# EAGLE board SparkFun_MicroMod_Function_SARA-R5-Panel (EAGLE 9.6.2), part 1 of 4
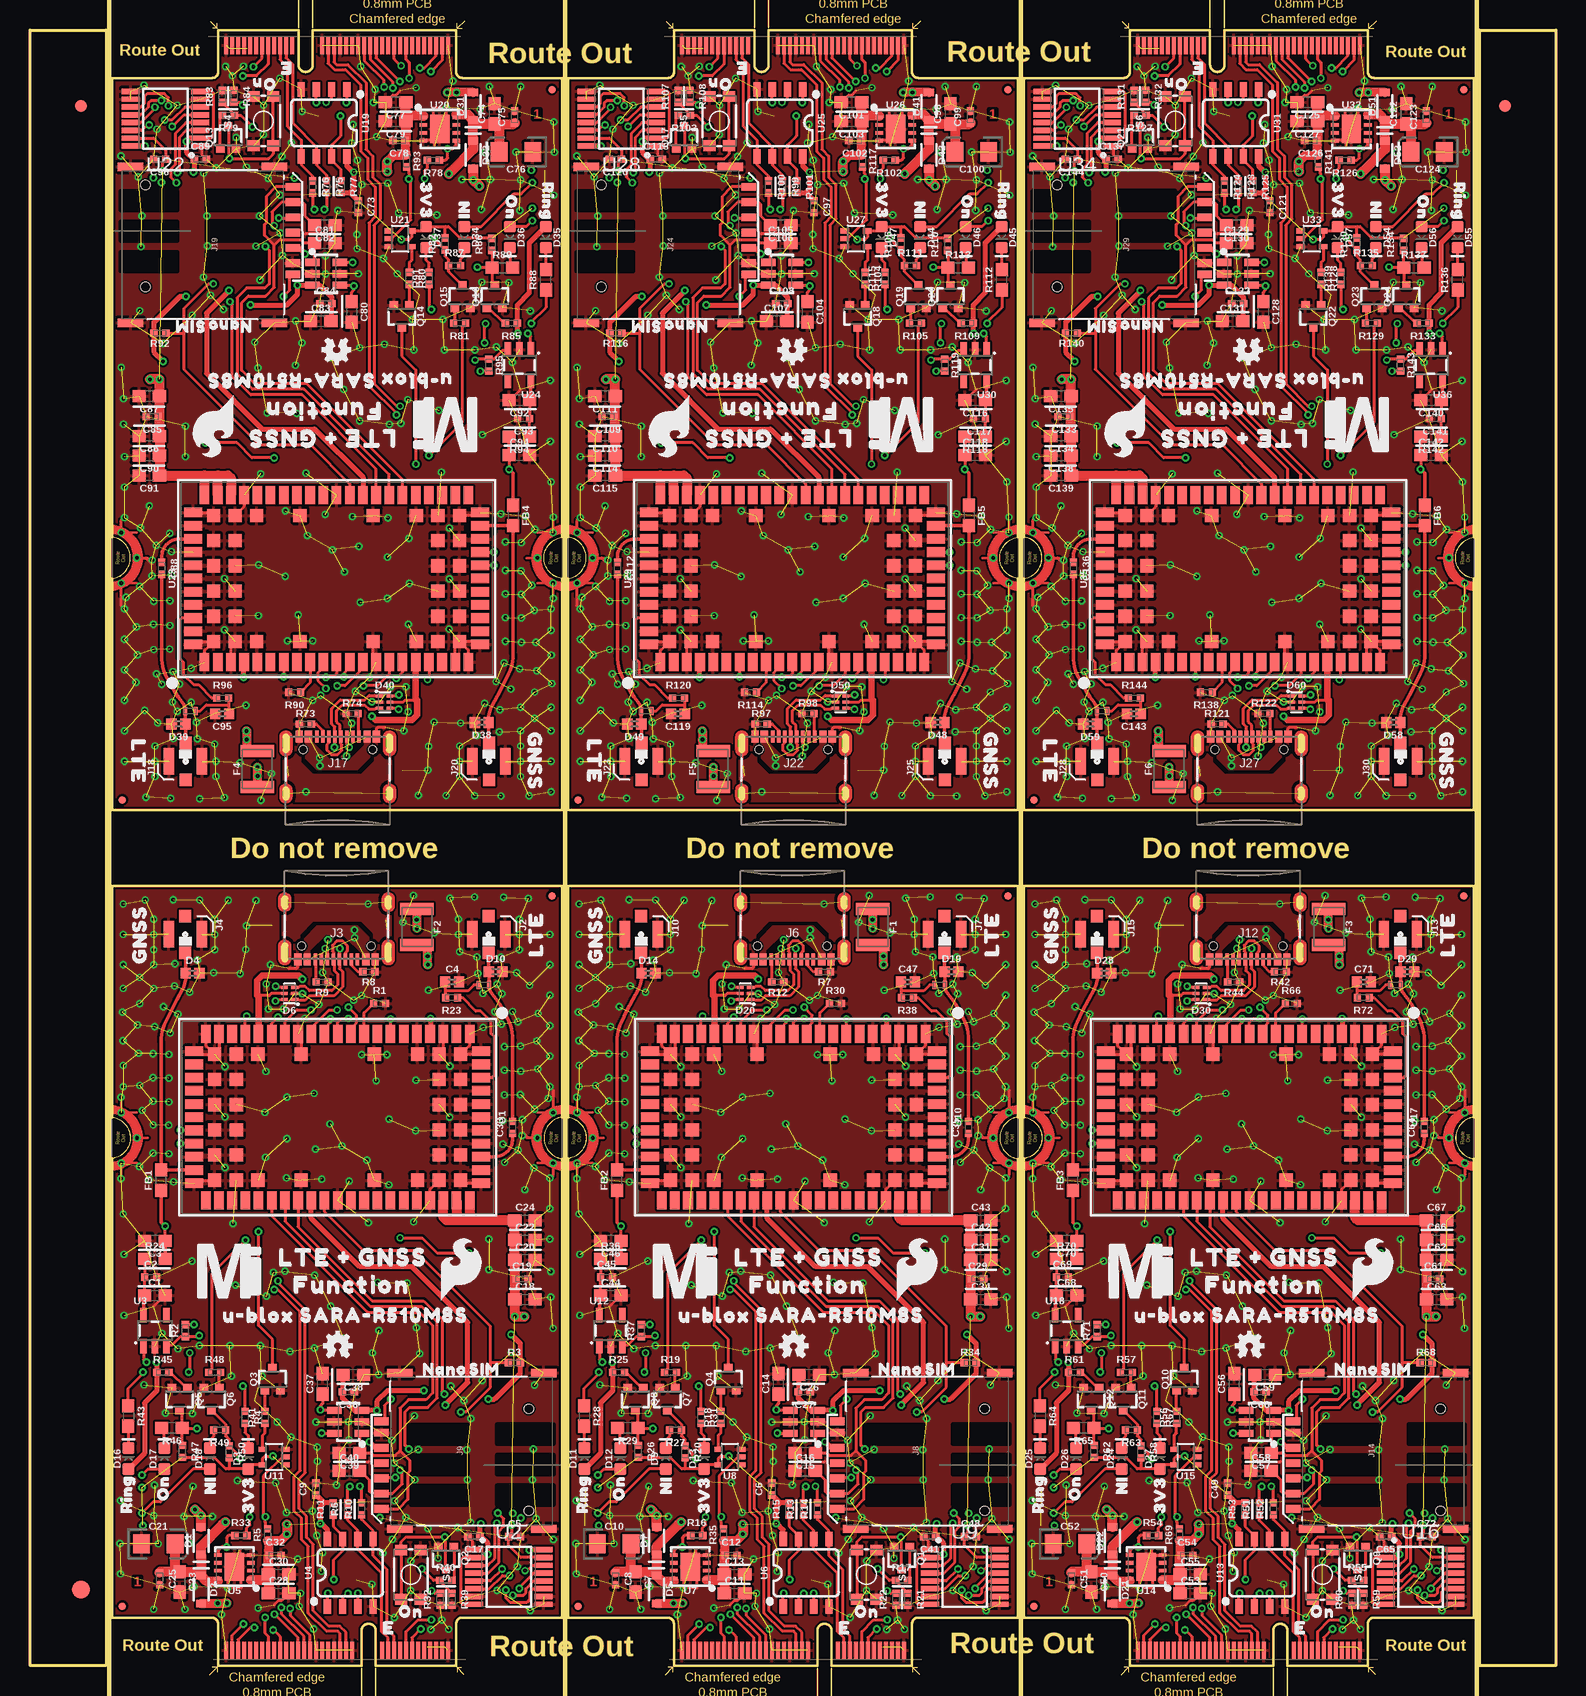
[diagram p0: board, top side]
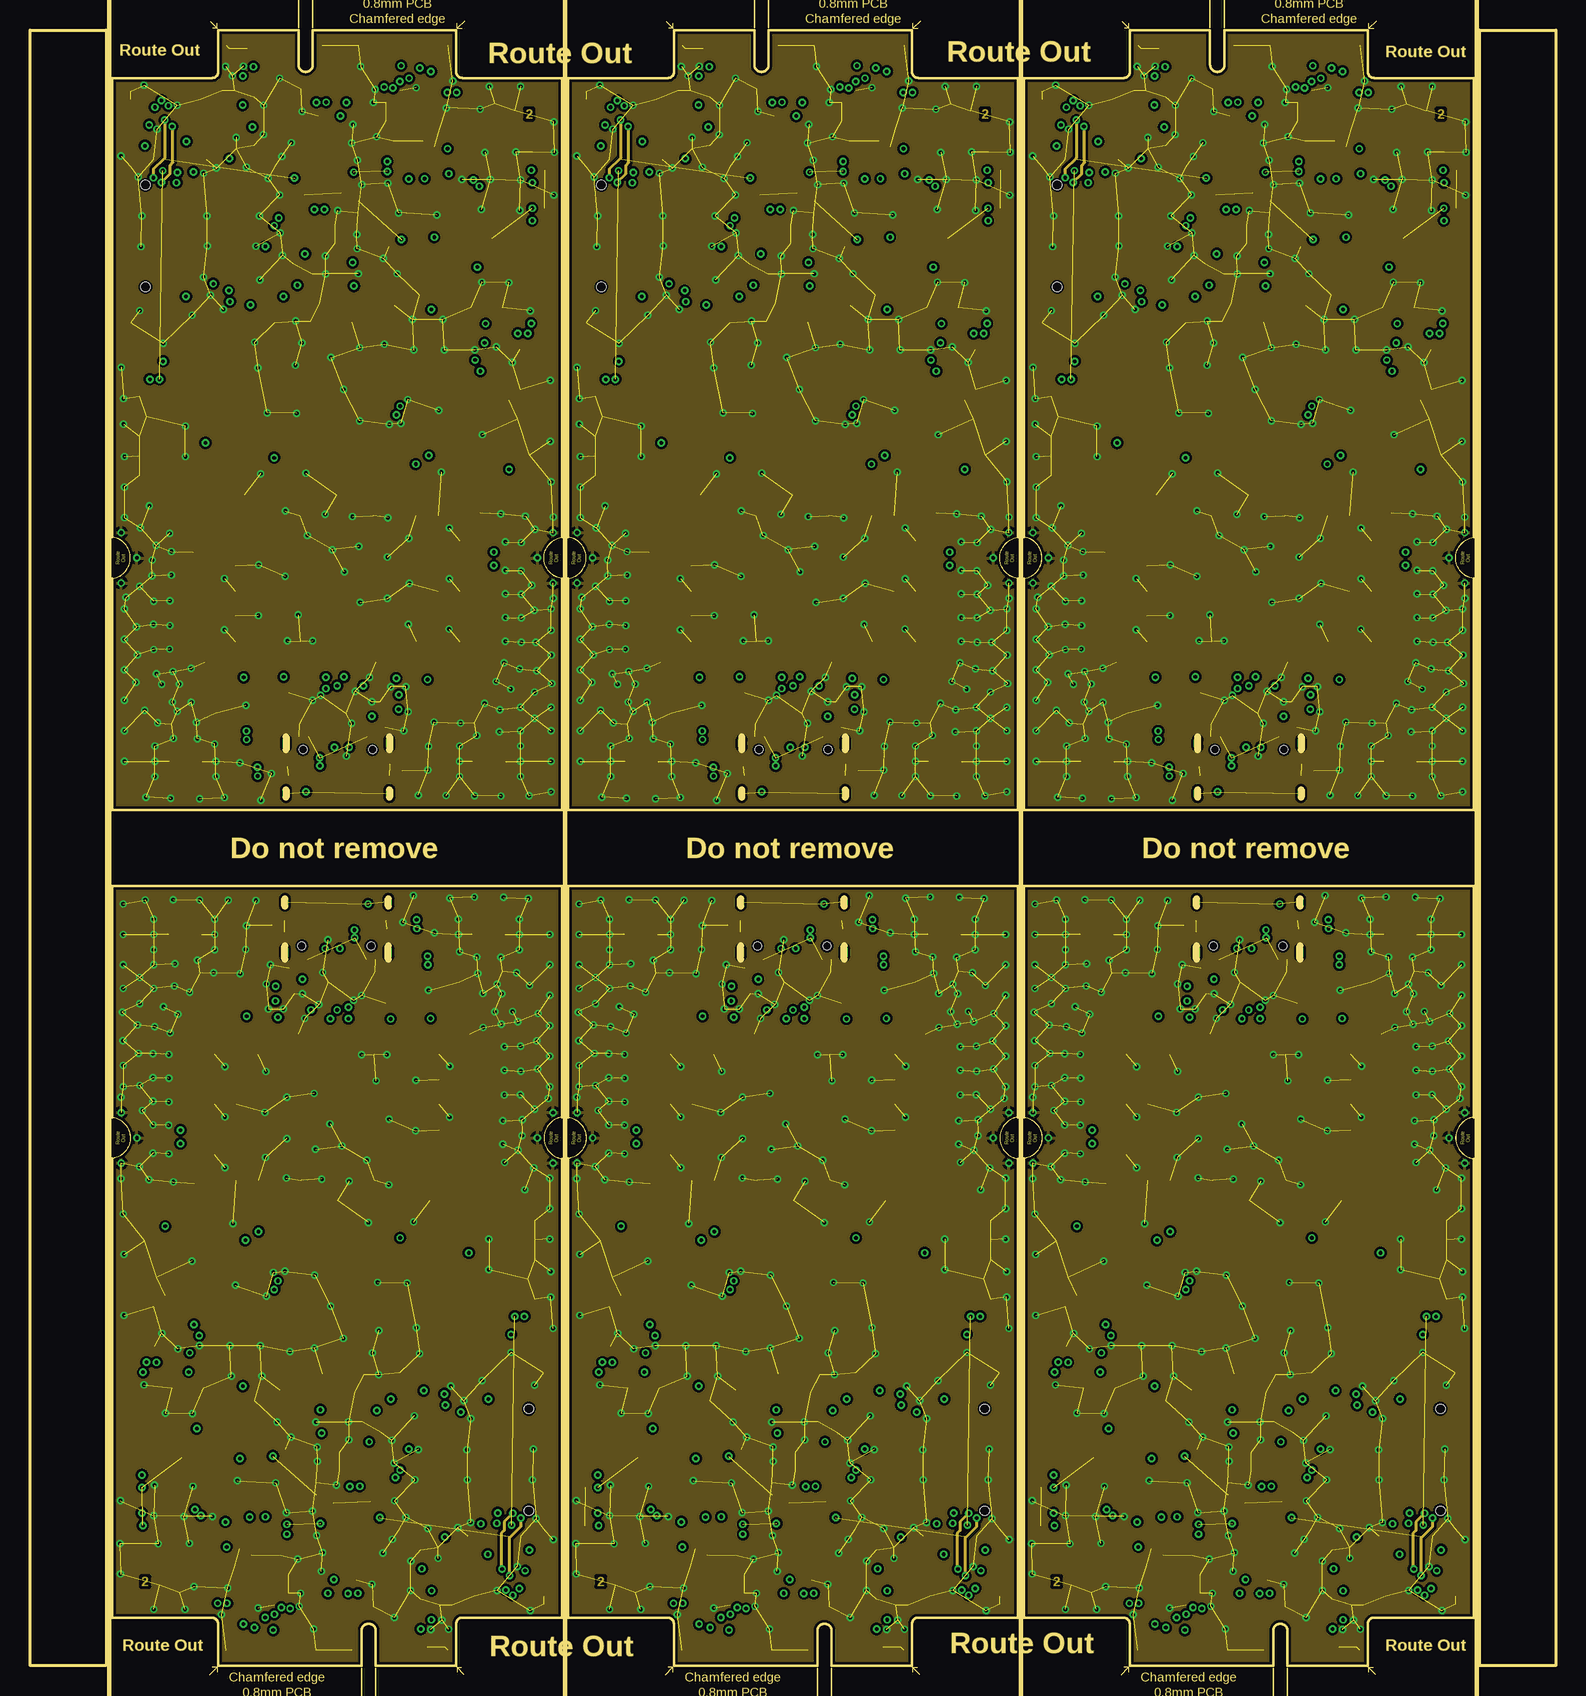
[diagram p1: board, inner layer Route2]
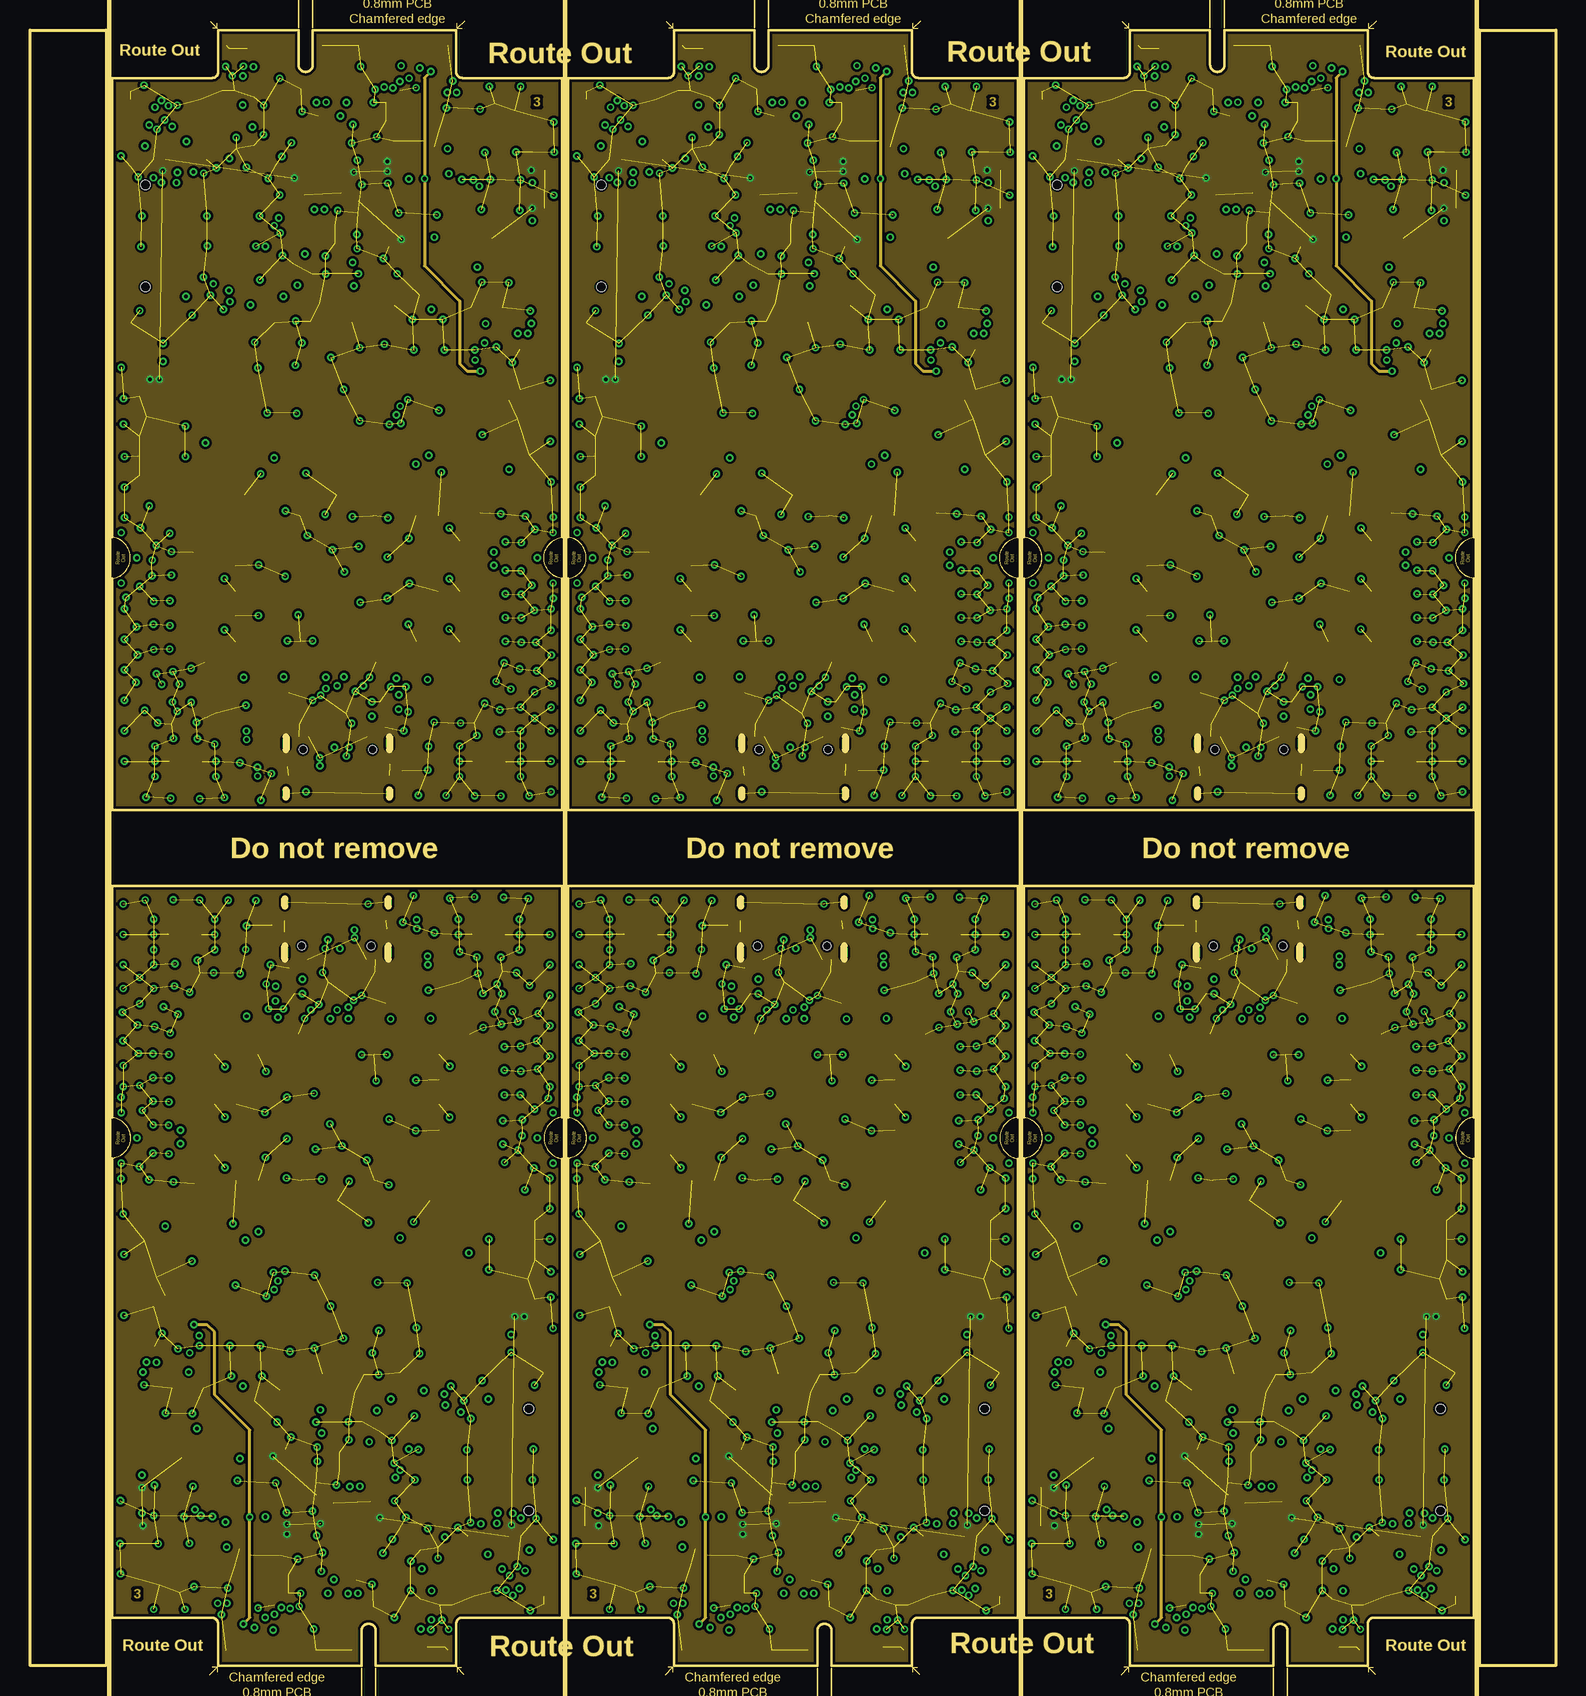
[diagram p2: board, inner layer Route15]
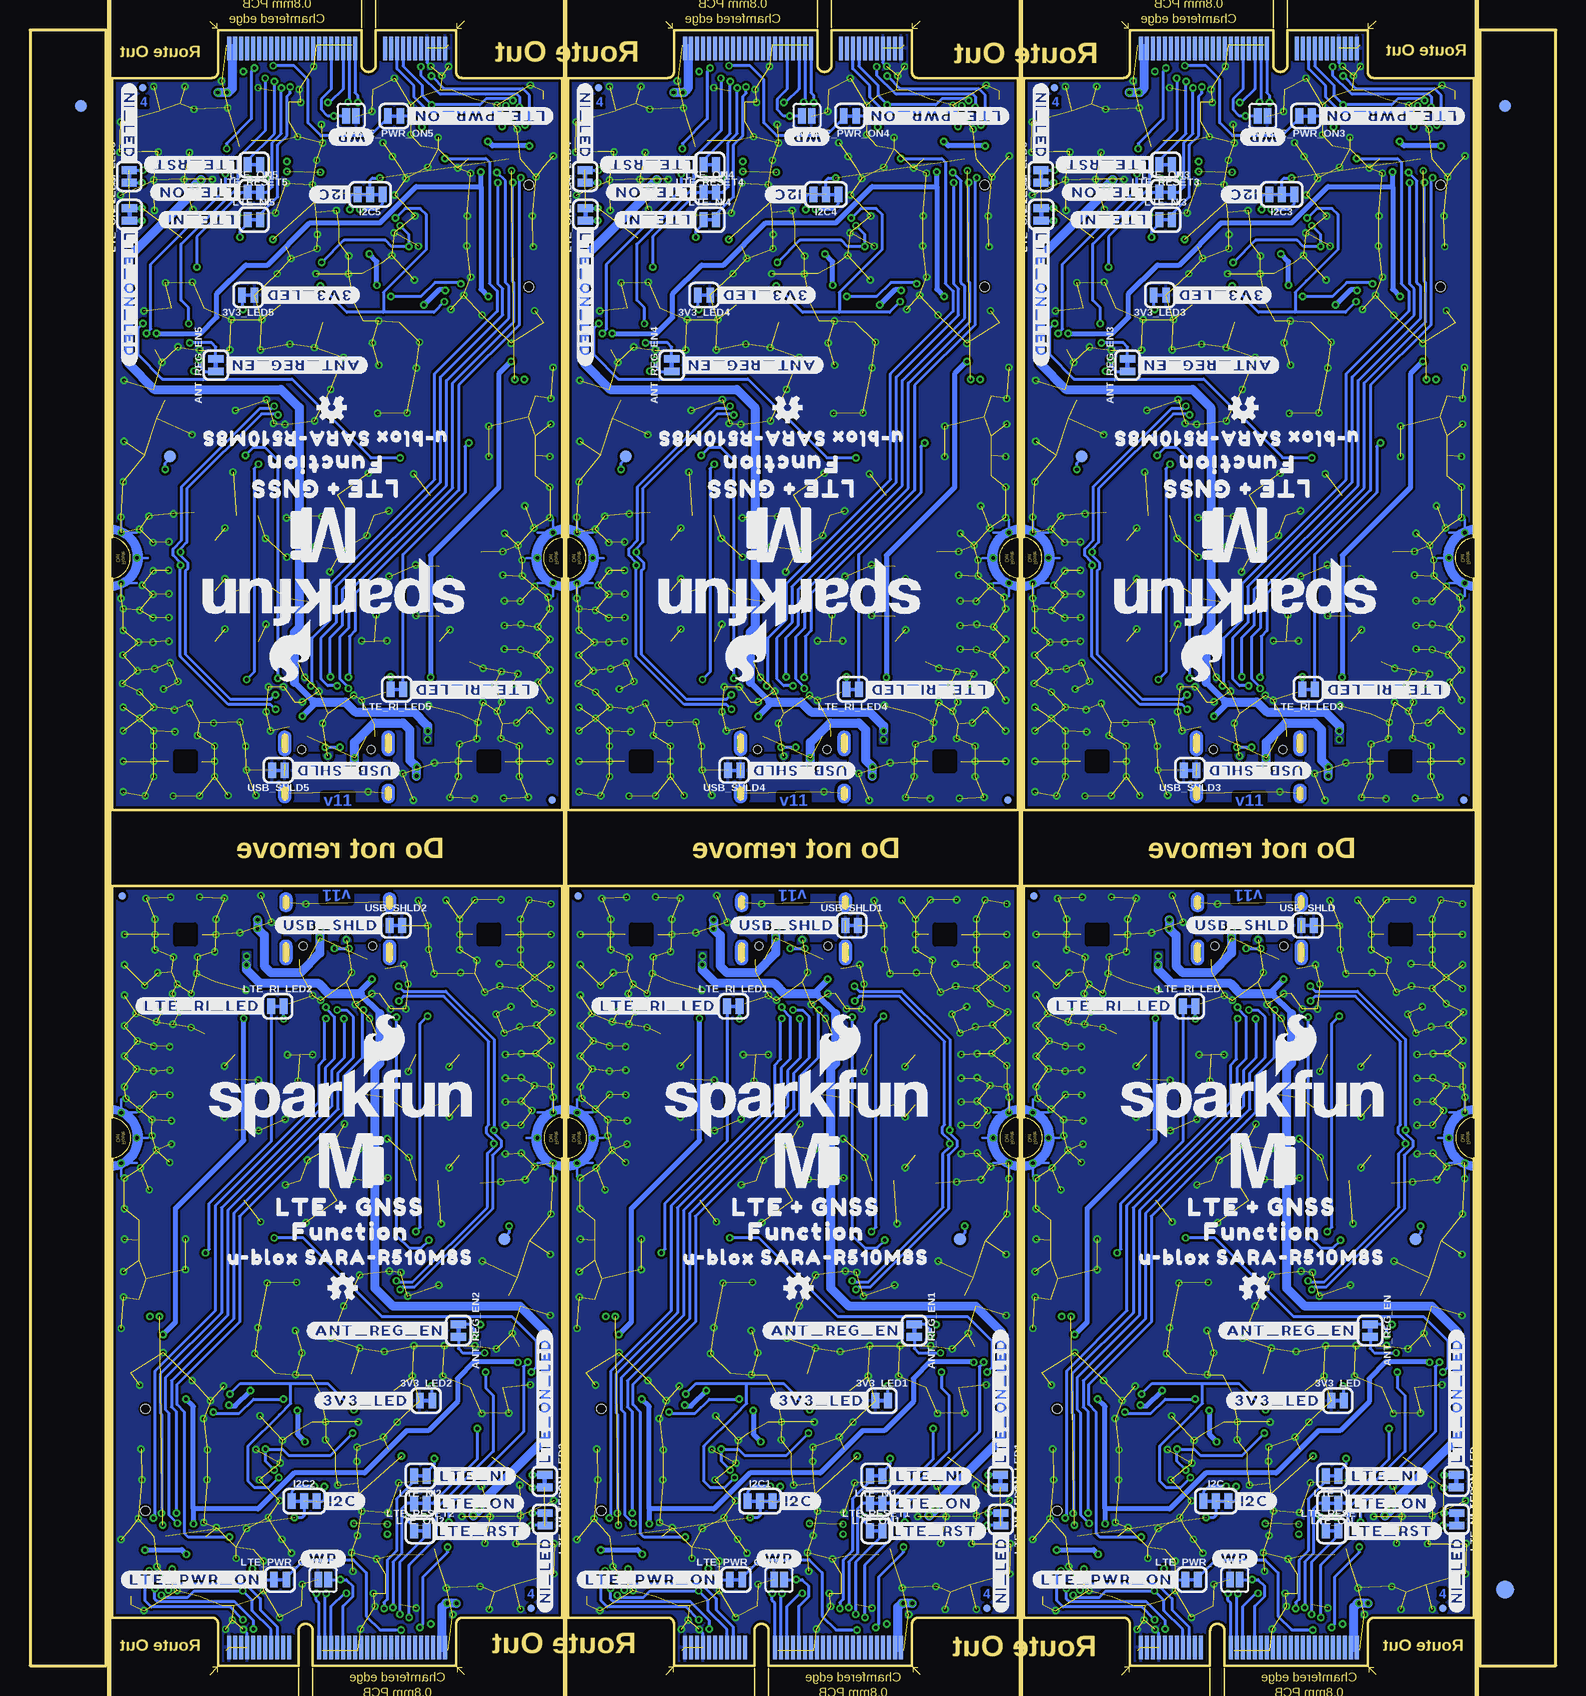
[diagram p3: board, bottom side, seen from below]

Size 127.2 x 136.35 mm. Coordinates in mm from the lower left corner, seen from the top.
Outline: 35.53,0 28.83,0 28.83,2.9 arc180 27.63,2.9 27.63,0 15.68,0 15.68,3.5 arc90 15.15,4 6.86,4 6.86,42.29 arc165 6.86,45.72 6.86,65 44.35,65 44.35,45.72 arc165 44.35,42.27 44.35,4 36,4 arc90 35.53,3.5 35.53,0
Outline: 73.53,0 66.83,0 66.83,2.9 arc180 65.63,2.9 65.63,0 53.68,0 53.68,3.5 arc90 53.15,4 44.86,4 44.86,42.29 arc165 44.86,45.72 44.86,65 82.35,65 82.35,45.72 arc165 82.35,42.27 82.35,4 74,4 arc90 73.53,3.5 73.53,0
Outline: 111.53,0 104.83,0 104.83,2.9 arc180 103.63,2.9 103.63,0 91.68,0 91.68,3.5 arc90 91.15,4 82.86,4 82.86,42.29 arc165 82.86,45.72 82.86,65 120.34,65 120.34,45.72 arc165 120.34,42.27 120.34,4 112,4 arc90 111.53,3.5 111.53,0
Outline: 15.68,136.35 22.38,136.35 22.38,133.45 arc180 23.58,133.45 23.58,136.35 35.53,136.35 35.53,132.85 arc90 36.05,132.35 44.35,132.35 44.35,94.06 arc165 44.35,90.63 44.35,71.35 6.86,71.35 6.86,90.63 arc165 6.86,94.08 6.86,132.35 15.2,132.35 arc90 15.68,132.85 15.68,136.35
Outline: 53.68,136.35 60.38,136.35 60.38,133.45 arc180 61.58,133.45 61.58,136.35 73.53,136.35 73.53,132.85 arc90 74.05,132.35 82.35,132.35 82.35,94.06 arc165 82.35,90.63 82.35,71.35 44.86,71.35 44.86,90.63 arc165 44.86,94.08 44.86,132.35 53.2,132.35 arc90 53.68,132.85 53.68,136.35
Outline: 91.67,136.35 98.37,136.35 98.37,133.45 arc180 99.57,133.45 99.57,136.35 111.52,136.35 111.52,132.85 arc90 112.05,132.35 120.34,132.35 120.34,94.06 arc165 120.34,90.63 120.34,71.35 82.86,71.35 82.86,90.63 arc165 82.86,94.08 82.86,132.35 91.2,132.35 arc90 91.67,132.85 91.67,136.35
Outline: 120.85,136.35 127.2,136.35 127.2,0 120.85,0 120.85,136.35
Outline: 0,136.35 6.35,136.35 6.35,0 0,0 0,136.35
Copper layers (1+2*15+16): Top 0.035mm / dielectric 1.5mm / Route2 0.035mm / dielectric 0.15mm / Route15 0.035mm / dielectric 0.2mm / Bottom 0.035mm
Design rules "SparkFun_MicroMod_Function_SARA-R5": minimum track width 4mil, minimum drill 0.2mm, track to track 4mil, track to pad 4mil, pad to pad 4mil, via to via 4mil, smd to smd 4mil, copper to edge 6mil, drill to drill 6mil, minimum pad ring 3mil, minimum via ring 3mil, stop-mask expansion 2.5mil, vias tented up to drill 25mil, thermal gap 10mil
Net classes: 2 supply: width 0.406 mm; 3 RF: width 0.312 mm, clearance 0.178 mm; 4 DiffPair: width 0.24 mm, clearance 0.178 mm
bRestrict: area 16,3.6 to 16.3,3.8; area 54,3.6 to 54.3,3.8; area 92,3.6 to 92.3,3.8; area 34.9,132.6 to 35.3,132.7; area 72.9,132.6 to 73.3,132.7; area 110.9,132.6 to 111.2,132.7
Milling: 4 lines

## Footprints (pad centres in the part's own frame; a part is rotated, then mirrored left to right if it is on the bottom)
SMT-JUMPER_2_NC_TRACE_SILK = smd 0.66 x 1.27: 1 -0.521,0; 2 0.521,0
0603 = smd 1.1 x 1: 1 -0.85,0; 2 0.85,0
0402-TIGHT = smd 0.6 x 0.6: 1 -0.5,0; 2 0.5,0
0402 = smd 0.85 x 0.9: 1 -0.58,0; 2 0.58,0
EIA3216 = smd 1.4 x 1.6: + 1.4,0; - -1.4,0
SOD-323 = smd 0.63 x 0.83: A 1.15,0; C -1.15,0
LED-0603 = smd 1 x 1: A -0.877,0; C 0.877,0
SOT886 = smd 0.61 x 0.25: 1 -0.405,0.5 | smd 0.56 x 0.25: 2 -0.43,0; 3 -0.43,-0.5; 4 0.43,-0.5; 5 0.43,0; 6 0.43,0.5
SOT23-6L = smd 0.6 x 1.2: 1 -0.95,-1.15; 2 0,-1.15; 3 0.95,-1.15; 4 0.95,1.15; 5 0,1.15; 6 -0.95,1.15
FIDUCIAL-1X2 = smd 1 x 1: 1 0,0
FIDUCIAL-1.5X3 = smd 1.5 x 1.5: 1 0,0
1210 = smd 1 x 2.8: 1 -1.5,0; 2 1.5,0
FIDUCIAL-MICRO = smd 0.635 x 0.635: 1 0,0
SMT-JUMPER_3_2-NC_TRACE_SILK = smd 0.66 x 1.27: 1 -1.041,0; 2 0,0; 3 1.041,0
M.2-CARD-E-22_FUNCTION_STANDARD = smd 0.35 x 1.45: 1 9.25,1.275; 3 8.75,1.275; 5 8.25,1.275; 7 7.75,1.275; 9 7.25,1.275; 11 6.75,1.275; 13 6.25,1.275; 15 5.75,1.275; 17 5.25,1.275; 19 4.75,1.275; 21 4.25,1.275; 23 3.75,1.275; 33 1.25,1.275; 35 0.75,1.275; 37 0.25,1.275; 39 -0.25,1.275; 41 -0.75,1.275; 43 -1.25,1.275; 45 -1.75,1.275; 47 -2.25,1.275; 49 -2.75,1.275; 51 -3.25,1.275; 53 -3.75,1.275; 55 -4.25,1.275; 57 -4.75,1.275; 59 -5.25,1.275; 61 -5.75,1.275; 63 -6.25,1.275; 65 -6.75,1.275; 67 -7.25,1.275; 69 -7.75,1.275; 71 -8.25,1.275; 73 -8.75,1.275; 75 -9.25,1.275 | smd 0.35 x 1.95 bottom: 2 9,1.525; 4 8.5,1.525; 6 8,1.525; 8 7.5,1.525; 10 7,1.525; 12 6.5,1.525; 14 6,1.525; 16 5.5,1.525; 18 5,1.525; 20 4.5,1.525; 22 4,1.525; 32 1.5,1.525; 34 1,1.525; 36 0.5,1.525; 38 0,1.525; 40 -0.5,1.525; 42 -1,1.525; 44 -1.5,1.525; 46 -2,1.525; 48 -2.5,1.525; 50 -3,1.525; 52 -3.5,1.525; 54 -4,1.525; 56 -4.5,1.525; 58 -5,1.525; 60 -5.5,1.525; 62 -6,1.525; 64 -6.5,1.525; 66 -7,1.525; 68 -7.5,1.525; 70 -8,1.525; 72 -8.5,1.525; 74 -9,1.525 | drill 0.305 pad 0.61: GND1 -18,41.9; GND2 -16.7,44; GND3 -18,46.1; GND4 18,41.9; GND5 16.7,44; GND6 18,46.1
U.FL = smd 2.2 x 0.85: 1 0,1.375; 2 0,-1.375 | smd 1.05 x 1: FEED 1.525,0; NC -1.525,0
USB-C-16P-2LAYER-PADS = smd 0.3 x 1: A5 -1.25,-0.34; A6 -0.25,-0.34; A7 0.25,-0.34; A8 1.25,-0.34; B5 1.75,-0.34; B6 0.75,-0.34; B7 -0.75,-0.34; B8 -1.75,-0.34 | smd 0.6 x 1: GND -3.225,-0.34; GND2 3.225,-0.34; VBUS1 -2.45,-0.34; VBUS2 2.45,-0.34 | drill 0.4 pad 0.6 long: SHLD1 -4.318,-0.915; SHLD2 4.318,-0.915; SHLD3 -4.318,-5.095; SHLD4 4.318,-5.095 | hole 0.65: -2.89,-1.445; 2.89,-1.445
NANO_SIM_PP = smd 0.7 x 2.1: A1 6.495,6; A2 -6.495,6; A3 -6.495,-6; A4 6.495,-6 | smd 0.65 x 1.23: C1 0.255,7.535; C2 -2.285,7.535; C3 -4.825,7.535; C5 1.525,7.535; C6 -1.015,7.535; C7 -3.555,7.535; CD 2.475,7.535 | hole 0.75: 3.505,-4.75; -4.995,-4.75
0402_COILCRAFT = smd 0.356 x 0.66: P$1 -0.432,0; P$2 0.432,0
SOT323 = smd 0.7 x 0.7: 1 -0.65,-0.925; 2 0.65,-0.925; 3 0,0.925
TACTILE_SWITCH_SMD_4.6X2.8MM = smd 0.9 x 1: 1 -2.05,-0.8; 2 2.05,-0.8; 3 2.05,0.8; 4 -2.05,0.8
PAD.03X.04 = smd 1.016 x 1.016: 1 0,0
SARA-LGA = smd 0.8 x 1.5: 1 -11,-6.95; 2 -9.9,-6.95; 3 -8.8,-6.95; 4 -7.7,-6.95; 5 -6.6,-6.95; 6 -5.5,-6.95; 7 -4.4,-6.95; 8 -3.3,-6.95; 9 -2.2,-6.95; 10 -1.1,-6.95; 11 0,-6.95; 12 1.1,-6.95; 13 2.2,-6.95; 14 3.3,-6.95; 15 4.4,-6.95; 16 5.5,-6.95; 17 6.6,-6.95; 18 7.7,-6.95; 19 8.8,-6.95; 20 9.9,-6.95; 21 11,-6.95; 33 11,6.95; 34 9.9,6.95; 35 8.8,6.95; 36 7.7,6.95; 37 6.6,6.95; 38 5.5,6.95; 39 4.4,6.95; 40 3.3,6.95; 41 2.2,6.95; 42 1.1,6.95; 43 0,6.95; 44 -1.1,6.95; 45 -2.2,6.95; 46 -3.3,6.95; 47 -4.4,6.95; 48 -5.5,6.95; 49 -6.6,6.95; 50 -7.7,6.95; 51 -8.8,6.95; 52 -9.9,6.95; 53 -11,6.95 | smd 1.5 x 0.8: 22 11.95,-5.5; 23 11.95,-4.4; 24 11.95,-3.3; 25 11.95,-2.2; 26 11.95,-1.1; 27 11.95,0; 28 11.95,1.1; 29 11.95,2.2; 30 11.95,3.3; 31 11.95,4.4; 32 11.95,5.5; 54 -11.95,5.5; 55 -11.95,4.4; 56 -11.95,3.3; 57 -11.95,2.2; 58 -11.95,1.1; 59 -11.95,0; 60 -11.95,-1.1; 61 -11.95,-2.2; 62 -11.95,-3.3; 63 -11.95,-4.4; 64 -11.95,-5.5 | smd 1.1 x 1.1: 65 -10.25,-5.25; 66 -10.25,-3.15; 67 -10.25,-1.05; 68 -10.25,1.05; 69 -10.25,3.15; 70 -10.25,5.25; 71 -8.45,-5.25; 72 -8.45,-3.15; 73 -8.45,-1.05; 74 -8.45,1.05; 75 -8.45,3.15; 76 -8.45,5.25; 77 -6.65,-5.25; 78 -6.65,5.25; 79 -3.05,-5.25; 80 -3.05,5.25; 81 3.05,-5.25; 82 3.05,5.25; 83 6.65,-5.25; 84 6.65,5.25; 85 8.45,-5.25; 86 8.45,-3.15; 87 8.45,-1.05; 88 8.45,1.05; 89 8.45,3.15; 90 8.45,5.25; 91 10.25,-5.25; 92 10.25,-3.15; 93 10.25,-1.05; 94 10.25,1.05; 95 10.25,3.15; 96 10.25,5.25
SOP65P640X120-16N = smd 1.5 x 0.45: 1 -2.9,2.275; 2 -2.9,1.625; 3 -2.9,0.975; 4 -2.9,0.325; 5 -2.9,-0.325; 6 -2.9,-0.975; 7 -2.9,-1.625; 8 -2.9,-2.275; 9 2.9,-2.275; 10 2.9,-1.625; 11 2.9,-0.975; 12 2.9,-0.325; 13 2.9,0.325; 14 2.9,0.975; 15 2.9,1.625; 16 2.9,2.275
SOT23-5 = smd 0.55 x 1.2: 1 -0.95,-1.3; 2 0,-1.3; 3 0.95,-1.3; 4 0.95,1.3; 5 -0.95,1.3
SO08 = smd 0.6 x 1.2: 1 -1.905,-2.8; 2 -0.635,-2.8; 3 0.635,-2.8; 4 1.905,-2.8; 5 1.905,2.8; 6 0.635,2.8; 7 -0.635,2.8; 8 -1.905,2.8
UDFN-8 = smd 0.3 x 0.65: 1 -0.975,-1.375; 2 -0.325,-1.375; 3 0.325,-1.375; 4 0.975,-1.375; 5 0.975,1.375; 6 0.325,1.375; 7 -0.325,1.375; 8 -0.975,1.375 | smd 2.35 x 1.6: EP 0,0
SOT353 = smd 0.42 x 0.7: 1 -0.65,-0.95; 2 0,-0.95; 3 0.65,-0.95; 4 0.65,0.95; 5 -0.65,0.95
SMT-JUMPER_2_NO_SILK = smd 0.635 x 1.27: 1 -0.406,0; 2 0.406,0

## Placement (x,y rotation side)
3V3_LED  JUMPER-SMT_2_NC_TRACE_SILK  [SMT-JUMPER_2_NC_TRACE_SILK]  18.19,22.1 0 bottom
3V3_LED1  JUMPER-SMT_2_NC_TRACE_SILK  [SMT-JUMPER_2_NC_TRACE_SILK]  56.19,22.1 0 bottom
3V3_LED2  JUMPER-SMT_2_NC_TRACE_SILK  [SMT-JUMPER_2_NC_TRACE_SILK]  94.18,22.1 0 bottom
3V3_LED3  JUMPER-SMT_2_NC_TRACE_SILK  [SMT-JUMPER_2_NC_TRACE_SILK]  33.02,114.25 180 bottom
3V3_LED4  JUMPER-SMT_2_NC_TRACE_SILK  [SMT-JUMPER_2_NC_TRACE_SILK]  71.02,114.25 180 bottom
3V3_LED5  JUMPER-SMT_2_NC_TRACE_SILK  [SMT-JUMPER_2_NC_TRACE_SILK]  109.02,114.25 180 bottom
ANT_REG_EN  JUMPER-SMT_2_NC_TRACE_SILK  [SMT-JUMPER_2_NC_TRACE_SILK]  15.49,27.94 270 bottom
ANT_REG_EN1  JUMPER-SMT_2_NC_TRACE_SILK  [SMT-JUMPER_2_NC_TRACE_SILK]  53.49,27.94 270 bottom
ANT_REG_EN2  JUMPER-SMT_2_NC_TRACE_SILK  [SMT-JUMPER_2_NC_TRACE_SILK]  91.49,27.94 270 bottom
ANT_REG_EN3  JUMPER-SMT_2_NC_TRACE_SILK  [SMT-JUMPER_2_NC_TRACE_SILK]  35.71,108.41 90 bottom
ANT_REG_EN4  JUMPER-SMT_2_NC_TRACE_SILK  [SMT-JUMPER_2_NC_TRACE_SILK]  73.71,108.41 90 bottom
ANT_REG_EN5  JUMPER-SMT_2_NC_TRACE_SILK  [SMT-JUMPER_2_NC_TRACE_SILK]  111.71,108.41 90 bottom
C1  1.0uF  [0603]  10.41,30.86 0 top
C2  0.1uF  [0402-TIGHT]  10.06,32.38 0 top
C3  47pF  [0603]  10.41,35.43 180 top
C4  27pF  [0402]  35.19,57 0 top
C5  0.1uF  [0402-TIGHT]  40.41,10.77 0 top
C6  0.1uF  [0402-TIGHT]  61.84,14.73 90 top
C7  0.22uF  [0603]  50.47,6.99 270 top
C8  0.1uF  [0402-TIGHT]  48.81,7.25 270 top
C9  0.1uF  [0402-TIGHT]  23.84,14.73 90 top
C10  10uF  [EIA3216]  48.69,10.16 0 top
C11  4.7uF  [0603]  58.73,6.03 0 top
C12  0.1uF  [0402-TIGHT]  58.45,9.21 0 top
C13  0.22uF  [0603]  58.73,7.62 0 top
C14  47pF  [0603]  62.41,23.5 90 top
C15  47pF  [0603]  64.63,17.76 180 top
C16  47pF  [0603]  64.61,16.27 0 top
C17  0.1uF  [0402-TIGHT]  37,10.77 180 top
C18  10uF  [0603]  41.26,30.53 0 top
C19  0.1uF  [0402-TIGHT]  41.01,32.24 0 top
C20  68pF  [0603]  41.26,33.84 0 top
C21  10uF  [EIA3216]  10.7,10.16 0 top
C22  15pF  [0603]  41.26,35.49 0 top
C23  0.22uF  [0603]  12.47,6.99 270 top
C24  8.2pF  [0603]  41.26,37.14 0 top
C25  0.1uF  [0402-TIGHT]  10.81,7.25 270 top
C26  47pF  [0603]  64.96,24.26 180 top
C27  0.1uF  [0402-TIGHT]  64.54,22.82 180 top
C28  4.7uF  [0603]  20.73,6.03 0 top
C29  0.1uF  [0402-TIGHT]  79.01,32.24 0 top
C30  0.22uF  [0603]  20.73,7.62 0 top
C31  68pF  [0603]  79.26,33.84 0 top
C32  0.1uF  [0402-TIGHT]  20.45,9.21 0 top
C33  33pF  [0402-TIGHT]  40.24,44.87 90 top
C34  10uF  [0603]  79.26,30.53 0 top
C35  33pF  [0402-TIGHT]  78.23,44.87 90 top
C36  0.1uF  [0402-TIGHT]  26.54,22.82 180 top
C37  47pF  [0603]  24.41,23.5 90 top
C38  47pF  [0603]  26.97,24.26 180 top
C39  47pF  [0603]  26.63,17.76 180 top
C40  47pF  [0603]  26.62,16.27 0 top
C41  0.1uF  [0402-TIGHT]  75,10.77 180 top
C42  15pF  [0603]  79.26,35.49 0 top
C43  8.2pF  [0603]  79.26,37.14 0 top
C44  1.0uF  [0603]  48.41,30.86 0 top
C45  0.1uF  [0402-TIGHT]  48.06,32.38 0 top
C46  47pF  [0603]  48.41,35.43 180 top
C47  27pF  [0402]  73.19,57 0 top
C48  0.1uF  [0402-TIGHT]  78.4,10.77 0 top
C49  0.1uF  [0402-TIGHT]  99.84,14.73 90 top
C50  0.22uF  [0603]  88.47,6.99 270 top
C51  0.1uF  [0402-TIGHT]  86.8,7.25 270 top
C52  10uF  [EIA3216]  86.69,10.16 0 top
C53  4.7uF  [0603]  96.72,6.03 0 top
C54  0.1uF  [0402-TIGHT]  96.45,9.21 0 top
C55  0.22uF  [0603]  96.72,7.62 0 top
C56  47pF  [0603]  100.41,23.5 90 top
C57  47pF  [0603]  102.63,17.76 180 top
C58  47pF  [0603]  102.61,16.27 0 top
C59  47pF  [0603]  102.96,24.26 180 top
C60  0.1uF  [0402-TIGHT]  102.54,22.82 180 top
C61  0.1uF  [0402-TIGHT]  117.01,32.24 0 top
C62  68pF  [0603]  117.26,33.84 0 top
C63  10uF  [0603]  117.26,30.53 0 top
C64  33pF  [0402-TIGHT]  116.23,44.87 90 top
C65  0.1uF  [0402-TIGHT]  113,10.77 180 top
C66  15pF  [0603]  117.26,35.49 0 top
C67  8.2pF  [0603]  117.26,37.14 0 top
C68  1.0uF  [0603]  86.41,30.86 0 top
C69  0.1uF  [0402-TIGHT]  86.06,32.38 0 top
C70  47pF  [0603]  86.41,35.43 180 top
C71  27pF  [0402]  111.19,57 0 top
C72  0.1uF  [0402-TIGHT]  116.4,10.77 0 top
C73  0.1uF  [0402-TIGHT]  27.37,121.62 270 top
C74  0.22uF  [0603]  38.73,129.36 90 top
C75  0.1uF  [0402-TIGHT]  40.4,129.1 90 top
C76  10uF  [EIA3216]  40.51,126.19 180 top
C77  4.7uF  [0603]  30.48,130.32 180 top
C78  0.1uF  [0402-TIGHT]  30.76,127.14 180 top
C79  0.22uF  [0603]  30.48,128.73 180 top
C80  47pF  [0603]  26.8,112.85 270 top
C81  47pF  [0603]  24.58,118.59 0 top
C82  47pF  [0603]  24.59,120.08 180 top
C83  47pF  [0603]  24.24,112.09 0 top
C84  0.1uF  [0402-TIGHT]  24.66,113.53 0 top
C85  0.1uF  [0402-TIGHT]  10.2,104.11 180 top
C86  68pF  [0603]  9.94,102.51 180 top
C87  10uF  [0603]  9.94,105.82 180 top
C88  33pF  [0402-TIGHT]  10.97,91.48 270 top
C89  0.1uF  [0402-TIGHT]  14.21,125.58 0 top
C90  15pF  [0603]  9.94,100.86 180 top
C91  8.2pF  [0603]  9.94,99.21 180 top
C92  1.0uF  [0603]  40.79,105.49 180 top
C93  0.1uF  [0402-TIGHT]  41.15,103.96 180 top
C94  47pF  [0603]  40.79,100.92 0 top
C95  27pF  [0402]  16.01,79.35 180 top
C96  0.1uF  [0402-TIGHT]  10.8,125.58 180 top
C97  0.1uF  [0402-TIGHT]  65.37,121.62 270 top
C98  0.22uF  [0603]  76.73,129.36 90 top
C99  0.1uF  [0402-TIGHT]  78.4,129.1 90 top
C100  10uF  [EIA3216]  78.51,126.19 180 top
C101  4.7uF  [0603]  68.48,130.32 180 top
C102  0.1uF  [0402-TIGHT]  68.76,127.14 180 top
C103  0.22uF  [0603]  68.48,128.73 180 top
C104  47pF  [0603]  64.79,112.85 270 top
C105  47pF  [0603]  62.57,118.59 0 top
C106  47pF  [0603]  62.59,120.08 180 top
C107  47pF  [0603]  62.24,112.09 0 top
C108  0.1uF  [0402-TIGHT]  62.66,113.53 0 top
C109  0.1uF  [0402-TIGHT]  48.19,104.11 180 top
C110  68pF  [0603]  47.94,102.51 180 top
C111  10uF  [0603]  47.94,105.82 180 top
C112  33pF  [0402-TIGHT]  48.97,91.48 270 top
C113  0.1uF  [0402-TIGHT]  52.2,125.58 0 top
C114  15pF  [0603]  47.94,100.86 180 top
C115  8.2pF  [0603]  47.94,99.21 180 top
C116  1.0uF  [0603]  78.79,105.49 180 top
C117  0.1uF  [0402-TIGHT]  79.15,103.96 180 top
C118  47pF  [0603]  78.79,100.92 0 top
C119  27pF  [0402]  54.01,79.35 180 top
C120  0.1uF  [0402-TIGHT]  48.8,125.58 180 top
C121  0.1uF  [0402-TIGHT]  103.36,121.62 270 top
C122  0.22uF  [0603]  114.73,129.36 90 top
C123  0.1uF  [0402-TIGHT]  116.4,129.1 90 top
C124  10uF  [EIA3216]  116.51,126.19 180 top
C125  4.7uF  [0603]  106.48,130.32 180 top
C126  0.1uF  [0402-TIGHT]  106.75,127.14 180 top
C127  0.22uF  [0603]  106.48,128.73 180 top
C128  47pF  [0603]  102.79,112.85 270 top
C129  47pF  [0603]  100.57,118.59 0 top
C130  47pF  [0603]  100.59,120.08 180 top
C131  47pF  [0603]  100.24,112.09 0 top
C132  0.1uF  [0402-TIGHT]  100.66,113.53 0 top
C133  0.1uF  [0402-TIGHT]  86.19,104.11 180 top
C134  68pF  [0603]  85.94,102.51 180 top
C135  10uF  [0603]  85.94,105.82 180 top
C136  33pF  [0402-TIGHT]  86.97,91.48 270 top
C137  0.1uF  [0402-TIGHT]  90.2,125.58 0 top
C138  15pF  [0603]  85.94,100.86 180 top
C139  8.2pF  [0603]  85.94,99.21 180 top
C140  1.0uF  [0603]  116.79,105.49 180 top
C141  0.1uF  [0402-TIGHT]  117.14,103.96 180 top
C142  47pF  [0603]  116.79,100.92 0 top
C143  27pF  [0402]  92.01,79.35 180 top
C144  0.1uF  [0402-TIGHT]  86.8,125.58 180 top
D1  3A/10V/280mV  [SOD-323]  14.25,10.41 90 top
D2  3A/10V/280mV  [SOD-323]  14.25,6.35 270 top
D3  RED  [LED-0603]  18.19,17.27 90 top
D4  PESD0402-0402  [0402]  13.55,57.72 0 top
D5  3A/10V/280mV  [SOD-323]  52.25,6.35 270 top
D6  PRTR5V0U2F  [SOT886]  21.63,56.02 180 top
D7  3A/10V/280mV  [SOD-323]  52.25,10.41 90 top
D8  DT1042-04SO-7  [SOT23-6L]  64.52,20.33 90 top
D9  BLUE  [LED-0603]  53.01,17.27 90 top
D10  PESD0402-0402  [0402]  38.83,57.85 0 top
D11  RED  [LED-0603]  46.22,17.27 90 top
D12  RED  [LED-0603]  49.2,17.27 90 top
D13  RED  [LED-0603]  56.19,17.27 90 top
D14  PESD0402-0402  [0402]  51.55,57.72 0 top
D15  DT1042-04SO-7  [SOT23-6L]  26.52,20.33 90 top
D16  RED  [LED-0603]  8.22,17.27 90 top
D17  RED  [LED-0603]  11.2,17.27 90 top
D18  BLUE  [LED-0603]  15.01,17.27 90 top
D19  PESD0402-0402  [0402]  76.82,57.85 0 top
D20  PRTR5V0U2F  [SOT886]  59.63,56.02 180 top
D21  3A/10V/280mV  [SOD-323]  90.25,6.35 270 top
D22  3A/10V/280mV  [SOD-323]  90.25,10.41 90 top
D23  DT1042-04SO-7  [SOT23-6L]  102.52,20.33 90 top
D24  BLUE  [LED-0603]  91.01,17.27 90 top
D25  RED  [LED-0603]  84.22,17.27 90 top
D26  RED  [LED-0603]  87.2,17.27 90 top
D27  RED  [LED-0603]  94.18,17.27 90 top
D28  PESD0402-0402  [0402]  89.55,57.72 0 top
D29  PESD0402-0402  [0402]  114.82,57.85 0 top
D30  PRTR5V0U2F  [SOT886]  97.63,56.02 180 top
D31  3A/10V/280mV  [SOD-323]  36.96,130 90 top
D32  3A/10V/280mV  [SOD-323]  36.96,125.94 270 top
D33  DT1042-04SO-7  [SOT23-6L]  24.68,116.02 270 top
D34  BLUE  [LED-0603]  36.19,119.08 270 top
D35  RED  [LED-0603]  42.99,119.08 270 top
D36  RED  [LED-0603]  40,119.08 270 top
D37  RED  [LED-0603]  33.02,119.08 270 top
D38  PESD0402-0402  [0402]  37.66,78.63 180 top
D39  PESD0402-0402  [0402]  12.38,78.5 180 top
D40  PRTR5V0U2F  [SOT886]  29.57,80.32 0 top
D41  3A/10V/280mV  [SOD-323]  74.95,130 90 top
D42  3A/10V/280mV  [SOD-323]  74.95,125.94 270 top
D43  DT1042-04SO-7  [SOT23-6L]  62.68,116.02 270 top
D44  BLUE  [LED-0603]  74.19,119.08 270 top
D45  RED  [LED-0603]  80.99,119.08 270 top
D46  RED  [LED-0603]  78,119.08 270 top
D47  RED  [LED-0603]  71.02,119.08 270 top
D48  PESD0402-0402  [0402]  75.66,78.63 180 top
D49  PESD0402-0402  [0402]  50.38,78.5 180 top
D50  PRTR5V0U2F  [SOT886]  67.57,80.32 0 top
D51  3A/10V/280mV  [SOD-323]  112.95,130 90 top
D52  3A/10V/280mV  [SOD-323]  112.95,125.94 270 top
D53  DT1042-04SO-7  [SOT23-6L]  100.68,116.02 270 top
D54  BLUE  [LED-0603]  112.19,119.08 270 top
D55  RED  [LED-0603]  118.98,119.08 270 top
D56  RED  [LED-0603]  116,119.08 270 top
D57  RED  [LED-0603]  109.02,119.08 270 top
D58  PESD0402-0402  [0402]  113.65,78.63 180 top
D59  PESD0402-0402  [0402]  88.38,78.5 180 top
D60  PRTR5V0U2F  [SOT886]  105.57,80.32 0 top
E$1  [FIDUCIAL-1X2]  4.23,130 0 top
E$2  [FIDUCIAL-1X2]  4.23,130 0 bottom
E$3  [FIDUCIAL-1X2]  122.97,130 0 top
E$4  [FIDUCIAL-1X2]  122.97,130 0 bottom
E$5  [FIDUCIAL-1.5X3]  4.23,6.35 0 top
E$6  [FIDUCIAL-1.5X3]  4.23,6.35 0 bottom
F1  6V/2A  [1210]  70.26,61.59 270 top
F2  6V/2A  [1210]  32.26,61.59 270 top
F3  6V/2A  [1210]  108.25,61.59 270 top
F4  6V/2A  [1210]  18.95,74.75 90 top
F5  6V/2A  [1210]  56.95,74.75 90 top
F6  6V/2A  [1210]  94.95,74.75 90 top
FB1  30Ω/1.8A  [0603]  10.94,40.47 90 top
FB2  30Ω/1.8A  [0603]  48.94,40.47 90 top
FB3  30Ω/1.8A  [0603]  86.94,40.47 90 top
FB4  30Ω/1.8A  [0603]  40.27,95.88 270 top
FB5  30Ω/1.8A  [0603]  78.27,95.88 270 top
FB6  30Ω/1.8A  [0603]  116.26,95.88 270 top
FD1  FIDUCIALUFIDUCIAL  [FIDUCIAL-MICRO]  7.69,4.96 90 top
FD2  FIDUCIALUFIDUCIAL  [FIDUCIAL-MICRO]  9.42,4.81 270 bottom
FD3  FIDUCIALUFIDUCIAL  [FIDUCIAL-MICRO]  43.5,64.17 90 top
FD4  FIDUCIALUFIDUCIAL  [FIDUCIAL-MICRO]  43.5,64.17 270 bottom
FD5  FIDUCIALUFIDUCIAL  [FIDUCIAL-MICRO]  45.69,4.96 90 top
FD6  FIDUCIALUFIDUCIAL  [FIDUCIAL-MICRO]  47.41,4.81 270 bottom
FD7  FIDUCIALUFIDUCIAL  [FIDUCIAL-MICRO]  81.5,64.17 90 top
FD8  FIDUCIALUFIDUCIAL  [FIDUCIAL-MICRO]  81.5,64.17 270 bottom
FD9  FIDUCIALUFIDUCIAL  [FIDUCIAL-MICRO]  83.69,4.96 90 top
FD10  FIDUCIALUFIDUCIAL  [FIDUCIAL-MICRO]  85.41,4.81 270 bottom
FD11  FIDUCIALUFIDUCIAL  [FIDUCIAL-MICRO]  119.5,64.17 90 top
FD12  FIDUCIALUFIDUCIAL  [FIDUCIAL-MICRO]  119.5,64.17 270 bottom
FD13  FIDUCIALUFIDUCIAL  [FIDUCIAL-MICRO]  43.51,131.39 270 top
FD14  FIDUCIALUFIDUCIAL  [FIDUCIAL-MICRO]  41.79,131.54 90 bottom
FD15  FIDUCIALUFIDUCIAL  [FIDUCIAL-MICRO]  7.7,72.18 270 top
FD16  FIDUCIALUFIDUCIAL  [FIDUCIAL-MICRO]  7.7,72.18 90 bottom
FD17  FIDUCIALUFIDUCIAL  [FIDUCIAL-MICRO]  81.51,131.39 270 top
FD18  FIDUCIALUFIDUCIAL  [FIDUCIAL-MICRO]  79.79,131.54 90 bottom
FD19  FIDUCIALUFIDUCIAL  [FIDUCIAL-MICRO]  45.7,72.18 270 top
FD20  FIDUCIALUFIDUCIAL  [FIDUCIAL-MICRO]  45.7,72.18 90 bottom
FD21  FIDUCIALUFIDUCIAL  [FIDUCIAL-MICRO]  119.51,131.39 270 top
FD22  FIDUCIALUFIDUCIAL  [FIDUCIAL-MICRO]  117.79,131.54 90 bottom
FD23  FIDUCIALUFIDUCIAL  [FIDUCIAL-MICRO]  83.7,72.18 270 top
FD24  FIDUCIALUFIDUCIAL  [FIDUCIAL-MICRO]  83.7,72.18 90 bottom
I2C  JUMPER-SMT_3_2-NC_TRACE_SILK  [SMT-JUMPER_3_2-NC_TRACE_SILK]  28.35,13.72 0 bottom
I2C1  JUMPER-SMT_3_2-NC_TRACE_SILK  [SMT-JUMPER_3_2-NC_TRACE_SILK]  66.35,13.72 0 bottom
I2C2  JUMPER-SMT_3_2-NC_TRACE_SILK  [SMT-JUMPER_3_2-NC_TRACE_SILK]  104.34,13.72 0 bottom
I2C3  JUMPER-SMT_3_2-NC_TRACE_SILK  [SMT-JUMPER_3_2-NC_TRACE_SILK]  22.86,122.63 180 bottom
I2C4  JUMPER-SMT_3_2-NC_TRACE_SILK  [SMT-JUMPER_3_2-NC_TRACE_SILK]  60.86,122.63 180 bottom
I2C5  JUMPER-SMT_3_2-NC_TRACE_SILK  [SMT-JUMPER_3_2-NC_TRACE_SILK]  98.86,122.63 180 bottom
J1  MICROMOD_FUNCTION_STANDARD  [M.2-CARD-E-22_FUNCTION_STANDARD]  25.6,0 0 top
J2  U.FL  [U.FL]  38.24,60.96 270 top
J3  [USB-C-16P-2LAYER-PADS]  25.55,58.55 180 top
J4  U.FL  [U.FL]  12.95,60.96 270 top
J5  MICROMOD_FUNCTION_STANDARD  [M.2-CARD-E-22_FUNCTION_STANDARD]  63.6,0 0 top
J6  [USB-C-16P-2LAYER-PADS]  63.55,58.55 180 top
J7  U.FL  [U.FL]  76.24,60.96 270 top
J8  NANO_SIM  [NANO_SIM_PP]  74.83,17.91 90 top
J9  NANO_SIM  [NANO_SIM_PP]  36.83,17.91 90 top
J10  U.FL  [U.FL]  50.95,60.96 270 top
J11  MICROMOD_FUNCTION_STANDARD  [M.2-CARD-E-22_FUNCTION_STANDARD]  101.6,0 0 top
J12  [USB-C-16P-2LAYER-PADS]  101.55,58.55 180 top
J13  U.FL  [U.FL]  114.24,60.96 270 top
J14  NANO_SIM  [NANO_SIM_PP]  112.83,17.91 90 top
J15  U.FL  [U.FL]  88.95,60.96 270 top
J16  MICROMOD_FUNCTION_STANDARD  [M.2-CARD-E-22_FUNCTION_STANDARD]  25.6,136.35 180 top
J17  [USB-C-16P-2LAYER-PADS]  25.65,77.8 0 top
J18  U.FL  [U.FL]  12.96,75.39 90 top
J19  NANO_SIM  [NANO_SIM_PP]  14.38,118.44 270 top
J20  U.FL  [U.FL]  38.25,75.39 90 top
J21  MICROMOD_FUNCTION_STANDARD  [M.2-CARD-E-22_FUNCTION_STANDARD]  63.6,136.35 180 top
J22  [USB-C-16P-2LAYER-PADS]  63.65,77.8 0 top
J23  U.FL  [U.FL]  50.96,75.39 90 top
J24  NANO_SIM  [NANO_SIM_PP]  52.37,118.44 270 top
J25  U.FL  [U.FL]  76.25,75.39 90 top
J26  MICROMOD_FUNCTION_STANDARD  [M.2-CARD-E-22_FUNCTION_STANDARD]  101.6,136.35 180 top
J27  [USB-C-16P-2LAYER-PADS]  101.65,77.8 0 top
J28  U.FL  [U.FL]  88.96,75.39 90 top
J29  NANO_SIM  [NANO_SIM_PP]  90.37,118.44 270 top
J30  U.FL  [U.FL]  114.25,75.39 90 top
L1  68nH  [0402_COILCRAFT]  75.83,56.75 0 top
L2  68nH  [0402_COILCRAFT]  37.83,56.75 0 top
L3  68nH  [0402_COILCRAFT]  113.83,56.75 0 top
L4  68nH  [0402_COILCRAFT]  13.37,79.6 180 top
L5  68nH  [0402_COILCRAFT]  51.37,79.6 180 top
L6  68nH  [0402_COILCRAFT]  89.37,79.6 180 top
LOGO1  SFE_LOGO_NAME_FLAME.2_INCH  [SFE_LOGO_NAME_FLAME_.2]  25.24,46.9 0 bottom
LOGO2  SFE_LOGO_FLAME.2_INCH  [SFE_LOGO_FLAME_.2]  35.94,33.02 0 top
LOGO3  SFE_LOGO_NAME_FLAME.2_INCH  [SFE_LOGO_NAME_FLAME_.2]  63.24,46.9 0 bottom
LOGO4  OSHW-LOGOMINI  [OSHW-LOGO-MINI]  25.65,26.67 0 top
LOGO5  SFE_LOGO_FLAME.2_INCH  [SFE_LOGO_FLAME_.2]  73.94,33.02 0 top
LOGO6  OSHW-LOGOMINI  [OSHW-LOGO-MINI]  25.15,31.5 0 bottom
LOGO7  OSHW-LOGOMINI  [OSHW-LOGO-MINI]  63.65,26.67 0 top
LOGO8  OSHW-LOGOMINI  [OSHW-LOGO-MINI]  63.14,31.5 0 bottom
LOGO9  SFE_LOGO_NAME_FLAME.2_INCH  [SFE_LOGO_NAME_FLAME_.2]  101.24,46.9 0 bottom
LOGO10  SFE_LOGO_FLAME.2_INCH  [SFE_LOGO_FLAME_.2]  111.94,33.02 0 top
LOGO11  OSHW-LOGOMINI  [OSHW-LOGO-MINI]  101.65,26.67 0 top
LOGO12  OSHW-LOGOMINI  [OSHW-LOGO-MINI]  101.14,31.5 0 bottom
LOGO13  SFE_LOGO_NAME_FLAME.2_INCH  [SFE_LOGO_NAME_FLAME_.2]  25.97,89.45 180 bottom
LOGO14  SFE_LOGO_FLAME.2_INCH  [SFE_LOGO_FLAME_.2]  15.27,103.33 180 top
LOGO15  OSHW-LOGOMINI  [OSHW-LOGO-MINI]  25.55,109.68 180 top
LOGO16  OSHW-LOGOMINI  [OSHW-LOGO-MINI]  26.06,104.85 180 bottom
LOGO17  SFE_LOGO_NAME_FLAME.2_INCH  [SFE_LOGO_NAME_FLAME_.2]  63.96,89.45 180 bottom
LOGO18  SFE_LOGO_FLAME.2_INCH  [SFE_LOGO_FLAME_.2]  53.26,103.33 180 top
LOGO19  OSHW-LOGOMINI  [OSHW-LOGO-MINI]  63.55,109.68 180 top
LOGO20  OSHW-LOGOMINI  [OSHW-LOGO-MINI]  64.06,104.85 180 bottom
LOGO21  SFE_LOGO_NAME_FLAME.2_INCH  [SFE_LOGO_NAME_FLAME_.2]  101.96,89.45 180 bottom
LOGO22  SFE_LOGO_FLAME.2_INCH  [SFE_LOGO_FLAME_.2]  91.26,103.33 180 top
LOGO23  OSHW-LOGOMINI  [OSHW-LOGO-MINI]  101.55,109.68 180 top
LOGO24  OSHW-LOGOMINI  [OSHW-LOGO-MINI]  102.06,104.85 180 bottom
LTE_NI  JUMPER-SMT_2_NC_TRACE_SILK  [SMT-JUMPER_2_NC_TRACE_SILK]  18.67,15.81 180 bottom
LTE_NI1  JUMPER-SMT_2_NC_TRACE_SILK  [SMT-JUMPER_2_NC_TRACE_SILK]  56.67,15.81 180 bottom
LTE_NI2  JUMPER-SMT_2_NC_TRACE_SILK  [SMT-JUMPER_2_NC_TRACE_SILK]  94.67,15.81 180 bottom
LTE_NI3  JUMPER-SMT_2_NC_TRACE_SILK  [SMT-JUMPER_2_NC_TRACE_SILK]  32.54,120.54 0 bottom
LTE_NI4  JUMPER-SMT_2_NC_TRACE_SILK  [SMT-JUMPER_2_NC_TRACE_SILK]  70.54,120.54 0 bottom
LTE_NI5  JUMPER-SMT_2_NC_TRACE_SILK  [SMT-JUMPER_2_NC_TRACE_SILK]  108.53,120.54 0 bottom
LTE_NI_LED  JUMPER-SMT_2_NC_TRACE_SILK  [SMT-JUMPER_2_NC_TRACE_SILK]  8.28,12.2 270 bottom
LTE_NI_LED1  JUMPER-SMT_2_NC_TRACE_SILK  [SMT-JUMPER_2_NC_TRACE_SILK]  46.27,12.2 270 bottom
LTE_NI_LED2  JUMPER-SMT_2_NC_TRACE_SILK  [SMT-JUMPER_2_NC_TRACE_SILK]  84.27,12.2 270 bottom
LTE_NI_LED3  JUMPER-SMT_2_NC_TRACE_SILK  [SMT-JUMPER_2_NC_TRACE_SILK]  42.93,124.15 90 bottom
LTE_NI_LED4  JUMPER-SMT_2_NC_TRACE_SILK  [SMT-JUMPER_2_NC_TRACE_SILK]  80.93,124.15 90 bottom
LTE_NI_LED5  JUMPER-SMT_2_NC_TRACE_SILK  [SMT-JUMPER_2_NC_TRACE_SILK]  118.93,124.15 90 bottom
LTE_ON  JUMPER-SMT_2_NC_TRACE_SILK  [SMT-JUMPER_2_NC_TRACE_SILK]  18.67,13.53 180 bottom
LTE_ON1  JUMPER-SMT_2_NC_TRACE_SILK  [SMT-JUMPER_2_NC_TRACE_SILK]  56.67,13.53 180 bottom
LTE_ON2  JUMPER-SMT_2_NC_TRACE_SILK  [SMT-JUMPER_2_NC_TRACE_SILK]  94.67,13.53 180 bottom
LTE_ON3  JUMPER-SMT_2_NC_TRACE_SILK  [SMT-JUMPER_2_NC_TRACE_SILK]  32.54,122.82 0 bottom
LTE_ON4  JUMPER-SMT_2_NC_TRACE_SILK  [SMT-JUMPER_2_NC_TRACE_SILK]  70.54,122.82 0 bottom
LTE_ON5  JUMPER-SMT_2_NC_TRACE_SILK  [SMT-JUMPER_2_NC_TRACE_SILK]  108.53,122.82 0 bottom
LTE_ON_LED  JUMPER-SMT_2_NC_TRACE_SILK  [SMT-JUMPER_2_NC_TRACE_SILK]  8.3,15.38 270 bottom
LTE_ON_LED1  JUMPER-SMT_2_NC_TRACE_SILK  [SMT-JUMPER_2_NC_TRACE_SILK]  46.3,15.38 270 bottom
LTE_ON_LED2  JUMPER-SMT_2_NC_TRACE_SILK  [SMT-JUMPER_2_NC_TRACE_SILK]  84.29,15.38 270 bottom
LTE_ON_LED3  JUMPER-SMT_2_NC_TRACE_SILK  [SMT-JUMPER_2_NC_TRACE_SILK]  42.91,120.97 90 bottom
LTE_ON_LED4  JUMPER-SMT_2_NC_TRACE_SILK  [SMT-JUMPER_2_NC_TRACE_SILK]  80.91,120.97 90 bottom
LTE_ON_LED5  JUMPER-SMT_2_NC_TRACE_SILK  [SMT-JUMPER_2_NC_TRACE_SILK]  118.91,120.97 90 bottom
LTE_PWR_ON  JUMPER-SMT_2_NC_TRACE_SILK  [SMT-JUMPER_2_NC_TRACE_SILK]  30.35,7.18 0 bottom
LTE_PWR_ON1  JUMPER-SMT_2_NC_TRACE_SILK  [SMT-JUMPER_2_NC_TRACE_SILK]  68.35,7.18 0 bottom
LTE_PWR_ON2  JUMPER-SMT_2_NC_TRACE_SILK  [SMT-JUMPER_2_NC_TRACE_SILK]  106.35,7.18 0 bottom
LTE_PWR_ON3  JUMPER-SMT_2_NC_TRACE_SILK  [SMT-JUMPER_2_NC_TRACE_SILK]  20.85,129.17 180 bottom
LTE_PWR_ON4  JUMPER-SMT_2_NC_TRACE_SILK  [SMT-JUMPER_2_NC_TRACE_SILK]  58.85,129.17 180 bottom
LTE_PWR_ON5  JUMPER-SMT_2_NC_TRACE_SILK  [SMT-JUMPER_2_NC_TRACE_SILK]  96.85,129.17 180 bottom
LTE_RESET  JUMPER-SMT_2_NC_TRACE_SILK  [SMT-JUMPER_2_NC_TRACE_SILK]  18.67,11.24 0 bottom
LTE_RESET1  JUMPER-SMT_2_NC_TRACE_SILK  [SMT-JUMPER_2_NC_TRACE_SILK]  56.67,11.24 0 bottom
LTE_RESET2  JUMPER-SMT_2_NC_TRACE_SILK  [SMT-JUMPER_2_NC_TRACE_SILK]  94.67,11.24 0 bottom
LTE_RESET3  JUMPER-SMT_2_NC_TRACE_SILK  [SMT-JUMPER_2_NC_TRACE_SILK]  32.54,125.11 180 bottom
LTE_RESET4  JUMPER-SMT_2_NC_TRACE_SILK  [SMT-JUMPER_2_NC_TRACE_SILK]  70.54,125.11 180 bottom
LTE_RESET5  JUMPER-SMT_2_NC_TRACE_SILK  [SMT-JUMPER_2_NC_TRACE_SILK]  108.53,125.11 180 bottom
LTE_RI_LED  JUMPER-SMT_2_NC_TRACE_SILK  [SMT-JUMPER_2_NC_TRACE_SILK]  30.57,54.97 0 bottom
LTE_RI_LED1  JUMPER-SMT_2_NC_TRACE_SILK  [SMT-JUMPER_2_NC_TRACE_SILK]  68.57,54.97 0 bottom
LTE_RI_LED2  JUMPER-SMT_2_NC_TRACE_SILK  [SMT-JUMPER_2_NC_TRACE_SILK]  106.57,54.97 0 bottom
LTE_RI_LED3  JUMPER-SMT_2_NC_TRACE_SILK  [SMT-JUMPER_2_NC_TRACE_SILK]  20.63,81.38 180 bottom
LTE_RI_LED4  JUMPER-SMT_2_NC_TRACE_SILK  [SMT-JUMPER_2_NC_TRACE_SILK]  58.63,81.38 180 bottom
LTE_RI_LED5  JUMPER-SMT_2_NC_TRACE_SILK  [SMT-JUMPER_2_NC_TRACE_SILK]  96.63,81.38 180 bottom
Q1  310mA/60V/1.6Ω  [SOT323]  72.68,8.96 180 top
Q2  310mA/60V/1.6Ω  [SOT323]  34.68,8.96 180 top
Q3  310mA/60V/1.6Ω  [SOT323]  20.22,23.88 0 top
Q4  310mA/60V/1.6Ω  [SOT323]  58.22,23.88 0 top
Q5  310mA/60V/1.6Ω  [SOT323]  12.47,22.23 180 top
Q6  310mA/60V/1.6Ω  [SOT323]  15.14,22.23 180 top
Q7  310mA/60V/1.6Ω  [SOT323]  53.14,22.23 180 top
Q8  310mA/60V/1.6Ω  [SOT323]  50.47,22.23 180 top
Q9  310mA/60V/1.6Ω  [SOT323]  110.68,8.96 180 top
Q10  310mA/60V/1.6Ω  [SOT323]  96.22,23.88 0 top
Q11  310mA/60V/1.6Ω  [SOT323]  91.14,22.23 180 top
Q12  310mA/60V/1.6Ω  [SOT323]  88.47,22.23 180 top
Q13  310mA/60V/1.6Ω  [SOT323]  16.52,127.39 0 top
Q14  310mA/60V/1.6Ω  [SOT323]  30.99,112.47 180 top
Q15  310mA/60V/1.6Ω  [SOT323]  36.07,114.12 0 top
Q16  310mA/60V/1.6Ω  [SOT323]  38.73,114.12 0 top
Q17  310mA/60V/1.6Ω  [SOT323]  54.52,127.39 0 top
Q18  310mA/60V/1.6Ω  [SOT323]  68.98,112.47 180 top
Q19  310mA/60V/1.6Ω  [SOT323]  74.06,114.12 0 top
Q20  310mA/60V/1.6Ω  [SOT323]  76.73,114.12 0 top
Q21  310mA/60V/1.6Ω  [SOT323]  92.52,127.39 0 top
Q22  310mA/60V/1.6Ω  [SOT323]  106.98,112.47 180 top
Q23  310mA/60V/1.6Ω  [SOT323]  112.06,114.12 0 top
Q24  310mA/60V/1.6Ω  [SOT323]  114.73,114.12 0 top
R1  100k  [0402-TIGHT]  29.15,55.21 0 top
R2  100k  [0402-TIGHT]  12.95,27.94 90 top
R3  100k  [0402-TIGHT]  40.38,25.26 0 top
R4  4.7k  [0402-TIGHT]  17.93,20.7 270 top
R5  10k  [0402-TIGHT]  19.81,10.92 90 top
R6  2.2k  [0402-TIGHT]  26.48,13.06 90 top
R7  5.1k  [0402-TIGHT]  66.24,57.85 180 top
R8  5.1k  [0402-TIGHT]  28.24,57.85 180 top
R9  5.1k  [0402-TIGHT]  24.34,56.98 180 top
R10  2.2k  [0402-TIGHT]  27.64,13.08 90 top
R11  10k  [0402-TIGHT]  25.28,13.07 90 top
R12  5.1k  [0402-TIGHT]  62.34,56.98 180 top
R13  2.2k  [0402-TIGHT]  64.48,13.06 90 top
R14  2.2k  [0402-TIGHT]  65.64,13.08 90 top
R15  10k  [0402-TIGHT]  63.28,13.07 90 top
R16  DNP  [0402-TIGHT]  55.58,10.85 0 top
R17  1k  [0402-TIGHT]  72.66,7.12 0 top
R18  1k  [0402-TIGHT]  57.58,20.7 90 top
R19  1k  [0402-TIGHT]  53.39,24.45 0 top
R20  100k  [0402-TIGHT]  54.6,17.83 270 top
R21  100k  [0402-TIGHT]  73.17,5.54 270 top
R22  100k  [0402-TIGHT]  72.2,5.53 90 top
R23  10k  [0402-TIGHT]  35.14,55.69 180 top
R24  10  [0603]  10.41,33.91 0 top
R25  1k  [0402-TIGHT]  49.07,24.45 0 top
R26  100k  [0402-TIGHT]  50.7,17.87 270 top
R27  2.2k  [0402-TIGHT]  53.81,19.65 180 top
R28  240  [0603]  46.2,20.82 270 top
R29  100  [0603]  49.84,19.81 180 top
R30  100k  [0402-TIGHT]  67.14,55.21 0 top
R31  4.7k  [0402-TIGHT]  55.93,20.7 270 top
R32  100k  [0402-TIGHT]  34.2,5.53 90 top
R33  DNP  [0402-TIGHT]  17.58,10.85 0 top
R34  100k  [0402-TIGHT]  78.38,25.26 0 top
R35  10k  [0402-TIGHT]  57.81,10.92 90 top
R36  10  [0603]  48.41,33.91 0 top
R37  100k  [0402-TIGHT]  50.95,27.94 90 top
R38  10k  [0402-TIGHT]  73.14,55.69 180 top
R39  100k  [0402-TIGHT]  35.17,5.54 270 top
R40  1k  [0402-TIGHT]  34.66,7.12 0 top
R41  1k  [0402-TIGHT]  19.59,20.7 90 top
R42  5.1k  [0402-TIGHT]  104.24,57.85 180 top
R43  240  [0603]  8.2,20.82 270 top
R44  5.1k  [0402-TIGHT]  100.34,56.98 180 top
R45  1k  [0402-TIGHT]  11.08,24.45 0 top
R46  100  [0603]  11.84,19.81 180 top
R47  100k  [0402-TIGHT]  12.7,17.87 270 top
R48  1k  [0402-TIGHT]  15.39,24.45 0 top
R49  2.2k  [0402-TIGHT]  15.81,19.65 180 top
R50  100k  [0402-TIGHT]  16.6,17.83 270 top
R51  2.2k  [0402-TIGHT]  102.48,13.06 90 top
R52  2.2k  [0402-TIGHT]  103.64,13.08 90 top
R53  10k  [0402-TIGHT]  101.27,13.07 90 top
R54  DNP  [0402-TIGHT]  93.58,10.85 0 top
R55  1k  [0402-TIGHT]  110.66,7.12 0 top
R56  1k  [0402-TIGHT]  95.58,20.7 90 top
R57  1k  [0402-TIGHT]  91.39,24.45 0 top
R58  100k  [0402-TIGHT]  92.6,17.83 270 top
R59  100k  [0402-TIGHT]  111.17,5.54 270 top
R60  100k  [0402-TIGHT]  110.2,5.53 90 top
R61  1k  [0402-TIGHT]  87.07,24.45 0 top
R62  100k  [0402-TIGHT]  88.7,17.87 270 top
R63  2.2k  [0402-TIGHT]  91.81,19.65 180 top
R64  240  [0603]  84.2,20.82 270 top
R65  100  [0603]  87.83,19.81 180 top
R66  100k  [0402-TIGHT]  105.14,55.21 0 top
R67  4.7k  [0402-TIGHT]  93.93,20.7 270 top
R68  100k  [0402-TIGHT]  116.38,25.26 0 top
R69  10k  [0402-TIGHT]  95.81,10.92 90 top
R70  10  [0603]  86.41,33.91 0 top
R71  100k  [0402-TIGHT]  88.95,27.94 90 top
R72  10k  [0402-TIGHT]  111.14,55.69 180 top
R73  5.1k  [0402-TIGHT]  22.96,78.5 0 top
R74  5.1k  [0402-TIGHT]  26.86,79.36 0 top
R75  2.2k  [0402-TIGHT]  24.73,123.29 270 top
R76  2.2k  [0402-TIGHT]  23.57,123.27 270 top
R77  10k  [0402-TIGHT]  25.93,123.28 270 top
R78  DNP  [0402-TIGHT]  33.62,125.5 180 top
R79  1k  [0402-TIGHT]  16.54,129.23 180 top
R80  1k  [0402-TIGHT]  31.62,115.65 270 top
R81  1k  [0402-TIGHT]  35.81,111.9 180 top
R82  100k  [0402-TIGHT]  34.61,118.52 90 top
R83  100k  [0402-TIGHT]  16.04,130.81 90 top
R84  100k  [0402-TIGHT]  17,130.82 270 top
R85  1k  [0402-TIGHT]  40.13,111.9 180 top
R86  100k  [0402-TIGHT]  38.5,118.48 90 top
R87  2.2k  [0402-TIGHT]  35.4,116.7 0 top
R88  240  [0603]  43,115.53 90 top
R89  100  [0603]  39.37,116.54 0 top
R90  100k  [0402-TIGHT]  22.06,81.14 180 top
R91  4.7k  [0402-TIGHT]  33.27,115.65 90 top
R92  100k  [0402-TIGHT]  10.83,111.09 180 top
R93  10k  [0402-TIGHT]  31.39,125.43 270 top
R94  10  [0603]  40.79,102.44 180 top
R95  100k  [0402-TIGHT]  38.25,108.41 270 top
R96  10k  [0402-TIGHT]  16.06,80.66 0 top
R97  5.1k  [0402-TIGHT]  60.96,78.5 0 top
R98  5.1k  [0402-TIGHT]  64.86,79.36 0 top
R99  2.2k  [0402-TIGHT]  62.72,123.29 270 top
R100  2.2k  [0402-TIGHT]  61.57,123.27 270 top
R101  10k  [0402-TIGHT]  63.93,123.28 270 top
R102  DNP  [0402-TIGHT]  71.62,125.5 180 top
R103  1k  [0402-TIGHT]  54.54,129.23 180 top
R104  1k  [0402-TIGHT]  69.62,115.65 270 top
R105  1k  [0402-TIGHT]  73.81,111.9 180 top
R106  100k  [0402-TIGHT]  72.6,118.52 90 top
R107  100k  [0402-TIGHT]  54.04,130.81 90 top
R108  100k  [0402-TIGHT]  55,130.82 270 top
R109  1k  [0402-TIGHT]  78.13,111.9 180 top
R110  100k  [0402-TIGHT]  76.5,118.48 90 top
R111  2.2k  [0402-TIGHT]  73.39,116.7 0 top
R112  240  [0603]  81,115.53 90 top
R113  100  [0603]  77.37,116.54 0 top
R114  100k  [0402-TIGHT]  60.06,81.14 180 top
R115  4.7k  [0402-TIGHT]  71.27,115.65 90 top
R116  100k  [0402-TIGHT]  48.83,111.09 180 top
R117  10k  [0402-TIGHT]  69.39,125.43 270 top
R118  10  [0603]  78.79,102.44 180 top
R119  100k  [0402-TIGHT]  76.25,108.41 270 top
R120  10k  [0402-TIGHT]  54.06,80.66 0 top
R121  5.1k  [0402-TIGHT]  98.96,78.5 0 top
R122  5.1k  [0402-TIGHT]  102.86,79.36 0 top
R123  2.2k  [0402-TIGHT]  100.72,123.29 270 top
R124  2.2k  [0402-TIGHT]  99.56,123.27 270 top
R125  10k  [0402-TIGHT]  101.93,123.28 270 top
R126  DNP  [0402-TIGHT]  109.62,125.5 180 top
R127  1k  [0402-TIGHT]  92.54,129.23 180 top
R128  1k  [0402-TIGHT]  107.62,115.65 270 top
R129  1k  [0402-TIGHT]  111.81,111.9 180 top
R130  100k  [0402-TIGHT]  110.6,118.52 90 top
R131  100k  [0402-TIGHT]  92.03,130.81 90 top
R132  100k  [0402-TIGHT]  93,130.82 270 top
R133  1k  [0402-TIGHT]  116.13,111.9 180 top
R134  100k  [0402-TIGHT]  114.5,118.48 90 top
R135  2.2k  [0402-TIGHT]  111.39,116.7 0 top
R136  240  [0603]  119,115.53 90 top
R137  100  [0603]  115.37,116.54 0 top
R138  100k  [0402-TIGHT]  98.06,81.14 180 top
R139  4.7k  [0402-TIGHT]  109.27,115.65 90 top
R140  100k  [0402-TIGHT]  86.82,111.09 180 top
R141  10k  [0402-TIGHT]  107.39,125.43 270 top
R142  10  [0603]  116.79,102.44 180 top
R143  100k  [0402-TIGHT]  114.25,108.41 270 top
R144  10k  [0402-TIGHT]  92.06,80.66 0 top
S1  PWR_ON  [TACTILE_SWITCH_SMD_4.6X2.8MM]  69.74,7.6 270 top
S2  PWR_ON  [TACTILE_SWITCH_SMD_4.6X2.8MM]  107.74,7.6 270 top
S3  PWR_ON  [TACTILE_SWITCH_SMD_4.6X2.8MM]  31.74,7.6 270 top
S4  PWR_ON  [TACTILE_SWITCH_SMD_4.6X2.8MM]  19.46,128.75 90 top
S5  PWR_ON  [TACTILE_SWITCH_SMD_4.6X2.8MM]  57.46,128.75 90 top
S6  PWR_ON  [TACTILE_SWITCH_SMD_4.6X2.8MM]  95.46,128.75 90 top
TP1  TEST-POINT3X4  [PAD.03X.04]  49.68,35.56 0 bottom
TP2  TEST-POINT3X4  [PAD.03X.04]  87.68,35.56 0 bottom
TP3  TEST-POINT3X4  [PAD.03X.04]  39.52,100.79 180 bottom
TP4  TEST-POINT3X4  [PAD.03X.04]  77.52,100.79 180 bottom
TP5  TEST-POINT3X4  [PAD.03X.04]  115.52,100.79 180 bottom
TP22  TEST-POINT3X4  [PAD.03X.04]  11.68,35.56 0 bottom
U1  SARA-R510M8S  [SARA-LGA]  25.65,45.72 180 top
U2  SN74AVC4T774PW  [SOP65P640X120-16N]  39.9,7.39 0 top
U3  3.3V  [SOT23-5]  10.41,27.94 0 top
U4  EEPROM  [SO08]  26.7,7.75 0 top
U5  AP7361C-33FGE  [UDFN-8]  17.04,8.26 90 top
U6  EEPROM  [SO08]  64.7,7.75 0 top
U7  AP7361C-33FGE  [UDFN-8]  55.04,8.26 90 top
U8  74HC1G04  [SOT353]  58.35,17.4 90 top
U9  SN74AVC4T774PW  [SOP65P640X120-16N]  77.9,7.39 0 top
U10  SARA-R510M8S  [SARA-LGA]  63.65,45.72 180 top
U11  74HC1G04  [SOT353]  20.35,17.4 90 top
U12  3.3V  [SOT23-5]  48.41,27.94 0 top
U13  EEPROM  [SO08]  102.69,7.75 0 top
U14  AP7361C-33FGE  [UDFN-8]  93.04,8.26 90 top
U15  74HC1G04  [SOT353]  96.34,17.4 90 top
U16  SN74AVC4T774PW  [SOP65P640X120-16N]  115.9,7.39 0 top
U17  SARA-R510M8S  [SARA-LGA]  101.65,45.72 180 top
U18  3.3V  [SOT23-5]  86.41,27.94 0 top
U19  EEPROM  [SO08]  24.51,128.6 180 top
U20  AP7361C-33FGE  [UDFN-8]  34.16,128.09 270 top
U21  74HC1G04  [SOT353]  30.86,118.95 270 top
U22  SN74AVC4T774PW  [SOP65P640X120-16N]  11.3,128.96 180 top
U23  SARA-R510M8S  [SARA-LGA]  25.55,90.63 0 top
U24  3.3V  [SOT23-5]  40.79,108.41 180 top
U25  EEPROM  [SO08]  62.51,128.6 180 top
U26  AP7361C-33FGE  [UDFN-8]  72.16,128.09 270 top
U27  74HC1G04  [SOT353]  68.86,118.95 270 top
U28  SN74AVC4T774PW  [SOP65P640X120-16N]  49.3,128.96 180 top
U29  SARA-R510M8S  [SARA-LGA]  63.55,90.63 0 top
U30  3.3V  [SOT23-5]  78.79,108.41 180 top
U31  EEPROM  [SO08]  100.51,128.6 180 top
U32  AP7361C-33FGE  [UDFN-8]  110.16,128.09 270 top
U33  74HC1G04  [SOT353]  106.86,118.95 270 top
U34  SN74AVC4T774PW  [SOP65P640X120-16N]  87.3,128.96 180 top
U35  SARA-R510M8S  [SARA-LGA]  101.55,90.63 0 top
U36  3.3V  [SOT23-5]  116.79,108.41 180 top
U$1  [#I2C#0]  25.15,13.72 0 bottom
U$2  [#ANT_REG_EN#0]  22.1,27.94 0 bottom
U$3  [MICROMOD_MI_LOGO_1]  24.38,42.13 0 bottom
U$4  [#3V3_LED#0]  23.24,22.1 0 bottom
U$5  [ON0]  31.74,4.52 0 top
U$6  [#LTE_ON#2]  10.03,13.53 0 bottom
U$7  [#LTE_NI#2]  10.73,15.81 0 bottom
U$8  [#LTE_PWR_ON#1]  31.31,7.18 0 bottom
U$9  [#NI_LED#0]  8.27,7.95 90 bottom
U$10  [#WP#0]  26.76,8.92 0 bottom
U$11  [LTE_#_GNSS0]  26.92,34.04 0 top
U$12  [MICROMOD_MI_LOGO_1]  16.64,32.92 0 top
U$13  [FUNCTION0]  26.8,31.75 0 top
U$14  [LTE_#_GNSS0]  24.51,38.23 0 bottom
U$15  [U#BLOX_SARA#R510M8S0]  26.29,29.21 0 top
U$16  [LTE0]  42.16,60.96 90 top
U$17  [GNSS0]  9.14,60.96 90 top
U$18  [NANO0]  34.59,24.72 0 top
U$19  [FUNCTION0]  24.51,36.2 0 bottom
U$20  [U#BLOX_SARA#R510M8S0]  24.51,34.04 0 bottom
U$21  [#USB_SHLD#0]  26.15,61.72 0 bottom
U$22  [#LTE_RI_LED#0]  36.88,55 0 bottom
U$23  [#LTE_RST#0]  13.75,11.22 0 bottom
U$24  [#LTE_ON_LED#0]  8.3,22.06 90 bottom
U$25  [#WP#0]  64.76,8.92 0 bottom
U$26  [NI0]  53.02,15.05 90 top
U$27  [ON0]  49.08,14.8 90 top
U$28  [3V34]  56.2,14.22 90 top
U$29  [NI0]  15.02,15.05 90 top
U$30  [RING0]  46.04,14.29 90 top
U$31  [ON0]  11.09,14.8 90 top
U$32  [NANO0]  72.59,24.72 0 top
U$33  [SIM0]  75.9,24.71 0 top
U$34  [ON0]  69.74,4.52 0 top
U$35  [MICROMOD_MI_LOGO_1]  54.64,32.92 0 top
U$36  [MICROMOD_MI_LOGO_1]  62.37,42.13 0 bottom
U$37  [#LTE_PWR_ON#1]  69.3,7.18 0 bottom
U$38  [#LTE_ON#2]  48.03,13.53 0 bottom
U$39  [#LTE_NI#2]  48.73,15.81 0 bottom
U$40  [LTE_#_GNSS0]  64.92,34.04 0 top
U$41  [FUNCTION0]  64.8,31.75 0 top
U$42  [U#BLOX_SARA#R510M8S0]  64.29,29.21 0 top
U$43  [LTE0]  80.16,60.96 90 top
U$44  [GNSS0]  47.14,60.96 90 top
U$45  [LTE_#_GNSS0]  62.51,38.23 0 bottom
U$46  [FUNCTION0]  62.51,36.2 0 bottom
U$47  [U#BLOX_SARA#R510M8S0]  62.51,34.04 0 bottom
U$48  [#ANT_REG_EN#0]  60.1,27.94 0 bottom
U$49  [#3V3_LED#0]  61.24,22.1 0 bottom
U$50  [#I2C#0]  63.14,13.72 0 bottom
U$51  [#USB_SHLD#0]  64.15,61.72 0 bottom
U$52  [#LTE_RI_LED#0]  74.88,55 0 bottom
U$53  [#LTE_RST#0]  51.75,11.22 0 bottom
U$54  [#NI_LED#0]  46.27,7.95 90 bottom
U$55  [#LTE_ON_LED#0]  46.29,22.06 90 bottom
U$56  [#WP#0]  102.76,8.92 0 bottom
U$57  [3V34]  18.2,14.22 90 top
U$58  [NI0]  91.02,15.05 90 top
U$59  [ON0]  87.08,14.8 90 top
U$60  [3V34]  94.19,14.22 90 top
U$61  [RING0]  84.03,14.29 90 top
U$62  [NANO0]  110.58,24.72 0 top
U$63  [SIM0]  113.9,24.71 0 top
U$64  [ON0]  107.74,4.52 0 top
U$65  [MICROMOD_MI_LOGO_1]  92.63,32.92 0 top
U$66  [MICROMOD_MI_LOGO_1]  100.37,42.13 0 bottom
U$67  [#LTE_PWR_ON#1]  107.3,7.18 0 bottom
U$68  [#LTE_ON#2]  86.03,13.53 0 bottom
U$69  [#LTE_NI#2]  86.73,15.81 0 bottom
U$70  [LTE_#_GNSS0]  102.92,34.04 0 top
U$71  [FUNCTION0]  102.79,31.75 0 top
U$72  [U#BLOX_SARA#R510M8S0]  102.29,29.21 0 top
U$73  [LTE0]  118.16,60.96 90 top
U$74  [GNSS0]  85.14,60.96 90 top
U$75  [LTE_#_GNSS0]  100.51,38.23 0 bottom
U$76  [FUNCTION0]  100.51,36.2 0 bottom
U$77  [U#BLOX_SARA#R510M8S0]  100.51,34.04 0 bottom
U$78  [#ANT_REG_EN#0]  98.09,27.94 0 bottom
U$79  [#3V3_LED#0]  99.24,22.1 0 bottom
U$80  [RING0]  8.04,14.29 90 top
U$81  [#I2C#0]  101.14,13.72 0 bottom
U$82  [#USB_SHLD#0]  102.15,61.72 0 bottom
U$83  [#LTE_RI_LED#0]  112.88,55 0 bottom
U$84  [#LTE_RST#0]  89.75,11.22 0 bottom
U$85  [#NI_LED#0]  84.26,7.95 90 bottom
U$86  [#LTE_ON_LED#0]  84.29,22.06 90 bottom
U$87  [#WP#0]  24.45,127.43 180 bottom
U$88  [NI0]  36.18,121.3 270 top
U$89  [ON0]  40.12,121.55 270 top
U$90  [3V34]  33.01,122.13 270 top
U$91  [RING0]  43.17,122.06 270 top
U$92  [NANO0]  16.62,111.63 180 top
U$93  [SIM0]  13.31,111.64 180 top
U$94  [ON0]  19.46,131.83 180 top
U$95  [MICROMOD_MI_LOGO_1]  34.57,103.43 180 top
U$96  [MICROMOD_MI_LOGO_1]  26.83,94.22 180 bottom
U$97  [#LTE_PWR_ON#1]  19.9,129.17 180 bottom
U$98  [#LTE_ON#2]  41.17,122.82 180 bottom
U$99  [#LTE_NI#2]  40.47,120.54 180 bottom
U$100  [LTE_#_GNSS0]  24.28,102.31 180 top
U$101  [FUNCTION0]  24.41,104.6 180 top
U$102  [U#BLOX_SARA#R510M8S0]  24.92,107.14 180 top
U$103  [LTE0]  9.04,75.39 270 top
U$104  [GNSS0]  42.06,75.39 270 top
U$105  [LTE_#_GNSS0]  26.7,98.12 180 bottom
U$106  [FUNCTION0]  26.7,100.15 180 bottom
U$107  [U#BLOX_SARA#R510M8S0]  26.7,102.31 180 bottom
U$108  [#ANT_REG_EN#0]  29.11,108.41 180 bottom
U$109  [#3V3_LED#0]  27.97,114.25 180 bottom
U$110  [#I2C#0]  26.06,122.63 180 bottom
U$111  [#USB_SHLD#0]  25.06,74.63 180 bottom
U$112  [#LTE_RI_LED#0]  14.33,81.35 180 bottom
U$113  [#LTE_RST#0]  37.45,125.13 180 bottom
U$114  [#NI_LED#0]  42.94,128.4 270 bottom
U$115  [#LTE_ON_LED#0]  42.91,114.28 270 bottom
U$116  [#WP#0]  62.44,127.43 180 bottom
U$117  [NI0]  74.18,121.3 270 top
U$118  [ON0]  78.12,121.55 270 top
U$119  [3V34]  71.01,122.13 270 top
U$120  [RING0]  81.17,122.06 270 top
U$121  [NANO0]  54.62,111.63 180 top
U$122  [SIM0]  51.31,111.64 180 top
U$123  [ON0]  57.46,131.83 180 top
U$124  [MICROMOD_MI_LOGO_1]  72.57,103.43 180 top
U$125  [MICROMOD_MI_LOGO_1]  64.83,94.22 180 bottom
U$126  [SIM0]  37.9,24.71 0 top
U$127  [#LTE_PWR_ON#1]  57.9,129.17 180 bottom
U$128  [#LTE_ON#2]  79.17,122.82 180 bottom
U$129  [#LTE_NI#2]  78.47,120.54 180 bottom
U$130  [LTE_#_GNSS0]  62.28,102.31 180 top
U$131  [FUNCTION0]  62.41,104.6 180 top
U$132  [U#BLOX_SARA#R510M8S0]  62.92,107.14 180 top
U$133  [LTE0]  47.04,75.39 270 top
U$134  [GNSS0]  80.06,75.39 270 top
U$135  [LTE_#_GNSS0]  64.69,98.12 180 bottom
U$136  [FUNCTION0]  64.69,100.15 180 bottom
U$137  [U#BLOX_SARA#R510M8S0]  64.69,102.31 180 bottom
U$138  [#ANT_REG_EN#0]  67.11,108.41 180 bottom
U$139  [#3V3_LED#0]  65.96,114.25 180 bottom
U$140  [#I2C#0]  64.06,122.63 180 bottom
U$141  [#USB_SHLD#0]  63.06,74.63 180 bottom
U$142  [#LTE_RI_LED#0]  52.32,81.35 180 bottom
U$143  [#LTE_RST#0]  75.45,125.13 180 bottom
U$144  [#NI_LED#0]  80.94,128.4 270 bottom
U$145  [#LTE_ON_LED#0]  80.91,114.28 270 bottom
U$146  [#WP#0]  100.44,127.43 180 bottom
U$147  [NI0]  112.18,121.3 270 top
U$148  [ON0]  116.12,121.55 270 top
U$149  [3V34]  109.01,122.13 270 top
U$150  [RING0]  119.17,122.06 270 top
U$151  [NANO0]  92.62,111.63 180 top
U$152  [SIM0]  89.3,111.64 180 top
U$153  [ON0]  95.46,131.83 180 top
U$154  [MICROMOD_MI_LOGO_1]  110.57,103.43 180 top
U$155  [MICROMOD_MI_LOGO_1]  102.83,94.22 180 bottom
U$156  [#LTE_PWR_ON#1]  95.9,129.17 180 bottom
U$157  [#LTE_ON#2]  117.17,122.82 180 bottom
U$158  [#LTE_NI#2]  116.47,120.54 180 bottom
U$159  [LTE_#_GNSS0]  100.28,102.31 180 top
U$160  [FUNCTION0]  100.41,104.6 180 top
U$161  [U#BLOX_SARA#R510M8S0]  100.91,107.14 180 top
U$162  [LTE0]  85.04,75.39 270 top
U$163  [GNSS0]  118.06,75.39 270 top
U$164  [LTE_#_GNSS0]  102.69,98.12 180 bottom
U$165  [FUNCTION0]  102.69,100.15 180 bottom
U$166  [U#BLOX_SARA#R510M8S0]  102.69,102.31 180 bottom
U$167  [#ANT_REG_EN#0]  105.11,108.41 180 bottom
U$168  [#3V3_LED#0]  103.96,114.25 180 bottom
U$169  [#I2C#0]  102.06,122.63 180 bottom
U$170  [#USB_SHLD#0]  101.05,74.63 180 bottom
U$171  [#LTE_RI_LED#0]  90.32,81.35 180 bottom
U$172  [#LTE_RST#0]  113.45,125.13 180 bottom
U$173  [#NI_LED#0]  118.94,128.4 270 bottom
U$174  [#LTE_ON_LED#0]  118.91,114.28 270 bottom
USB_SHLD  JUMPER-SMT_2_NC_TRACE_SILK  [SMT-JUMPER_2_NC_TRACE_SILK]  20.71,61.71 0 bottom
USB_SHLD1  JUMPER-SMT_2_NC_TRACE_SILK  [SMT-JUMPER_2_NC_TRACE_SILK]  58.71,61.71 0 bottom
USB_SHLD2  JUMPER-SMT_2_NC_TRACE_SILK  [SMT-JUMPER_2_NC_TRACE_SILK]  96.71,61.71 0 bottom
USB_SHLD3  JUMPER-SMT_2_NC_TRACE_SILK  [SMT-JUMPER_2_NC_TRACE_SILK]  30.5,74.64 180 bottom
USB_SHLD4  JUMPER-SMT_2_NC_TRACE_SILK  [SMT-JUMPER_2_NC_TRACE_SILK]  68.5,74.64 180 bottom
USB_SHLD5  JUMPER-SMT_2_NC_TRACE_SILK  [SMT-JUMPER_2_NC_TRACE_SILK]  106.49,74.64 180 bottom
WP  [SMT-JUMPER_2_NO_SILK]  26.76,7.18 0 bottom
WP1  [SMT-JUMPER_2_NO_SILK]  64.76,7.18 0 bottom
WP2  [SMT-JUMPER_2_NO_SILK]  102.76,7.18 0 bottom
WP3  [SMT-JUMPER_2_NO_SILK]  24.45,129.17 180 bottom
WP4  [SMT-JUMPER_2_NO_SILK]  62.44,129.17 180 bottom
WP5  [SMT-JUMPER_2_NO_SILK]  100.44,129.17 180 bottom

## Library data of the parts
3V3_LED 3V3_LED1-3V3_LED5 ANT_REG_EN ANT_REG_EN1-ANT_REG_EN5 I2C I2C1-I2C5 LTE_NI LTE_NI1-LTE_NI5 LTE_NI_LED LTE_NI_LED1-LTE_NI_LED5 LTE_ON LTE_ON1-LTE_ON5 LTE_ON_LED LTE_ON_LED1-LTE_ON_LED5 LTE_PWR_ON LTE_PWR_ON1-LTE_PWR_ON5 LTE_RESET LTE_RESET1-LTE_RESET5 LTE_RI_LED LTE_RI_LED1-LTE_RI_LED5 USB_SHLD USB_SHLD1-USB_SHLD5 WP WP1-WP5 = SparkFun-Jumpers
C1 C44 C68 C92 C116 C140 = SparkFun-Capacitors; PROD_ID: CAP-00868
C2 C5 C6 C8 C9 C12 C17 C19 C25 C27 C29 C32 C36 C41 C45 C48 C49 C51 C54 C60 C61 C65 C69 C72 C73 C75 C78 C84 C85 C89 C93 C96 C97 C99 C102 C108 C109 C113 C117 C120 C121 C123 C126 C132 C133 C137 C141 C144 = SparkFun-Capacitors; PROD_ID: CAP-12416
C3 C14-C16 C26 C37-C40 C46 C56-C59 C70 C80-C83 C94 C104-C107 C118 C128-C131 C142 = SparkFun-Capacitors; PROD_ID: CAP-08913
C4 C47 C71 C95 C119 C143 = SparkFun-Capacitors; PROD_ID: CAP-15357
C7 C13 C23 C30 C50 C55 C74 C79 C98 C103 C122 C127 = SparkFun-Capacitors; PROD_ID: CAP-07822
C10 C21 C52 C76 C100 C124 = SparkFun-Capacitors; PROD_ID: CAP-00811
C11 C28 C53 C77 C101 C125 = SparkFun-Capacitors; PROD_ID: CAP-08280
C18 C34 C63 C87 C111 C135 = SparkFun-Capacitors; PROD_ID: CAP-11015
C20 C31 C62 C86 C110 C134 = SparkFun-Capacitors; PROD_ID: CAP-14092
C22 C42 C66 C90 C114 C138 = SparkFun-Capacitors; PROD_ID: CAP-07881
C24 C43 C67 C91 C115 C139 = SparkFun-Capacitors; PROD_ID: CAP-16662
C33 C35 C64 C88 C112 C136 = SparkFun-Capacitors; PROD_ID: CAP-15358
D1 D2 D5 D7 D21 D22 D31 D32 D41 D42 D51 D52 = SparkFun-DiscreteSemi; PROD_ID: DIO-14072
D3 D11-D13 D16 D17 D25-D27 D35-D37 D45-D47 D55-D57 = SparkFun-LED; PROD_ID: DIO-17976
D4 D10 D14 D19 D28 D29 D38 D39 D48 D49 D58 D59 = SparkFun-DiscreteSemi; DIGIKEY_PART: PESD0402-140CT-ND; MOUSE_PART: 650-PESD0402-140; PROD_ID: DIO-15359
D6 D20 D30 D40 D50 D60 = SparkFun-IC-Power; PROD_ID: DIO-14084
D8 D15 D23 D33 D43 D53 = SparkFun-DiscreteSemi; PROD_ID: DIO-14095
D9 D18 D24 D34 D44 D54 = SparkFun-LED; PROD_ID: DIO-08575
E$1-E$4 FD1-FD24 LOGO1-LOGO24 = SparkFun-Aesthetics
E$5 E$6 = SparkFun-Retired
F1-F6 = SparkFun-Fuses; PROD_ID: RES-14313
FB1-FB6 = SparkFun-Coils; PROD_ID: NDUC-13805
J1 J5 J11 J16 J21 J26 U$3 U$12 U$35 U$36 U$65 U$66 U$95 U$96 U$124 U$125 U$154 U$155 = SparkFun-MicroMod
J2 J4 J7 J10 J13 J15 J18 J20 J23 J25 J28 J30 = SparkFun-Connectors; PROD_ID: CONN-09193; SF_ID: WRL-09144
J3 J6 J12 J17 J22 J27 = SparkFun-Connectors; PROD_ID: CONN-14122
J8 J9 J14 J19 J24 J29 = SparkFun-Connectors; PROD_ID: CONN-16272
L1-L6 = SparkFun-Coils; PROD_ID: NDUC-15356
Q1-Q24 = SparkFun-DiscreteSemi; PROD_ID: TRANS-11151
R1-R3 R16 R20-R22 R26 R30 R32-R34 R37 R39 R47 R50 R54 R58-R60 R62 R66 R68 R71 R78 R82-R84 R86 R90 R92 R95 R102 R106-R108 R110 R114 R116 R119 R126 R130-R132 R134 R138 R140 R143 = SparkFun-Resistors; PROD_ID: RES-13495
R4 R31 R67 R91 R115 R139 = SparkFun-Resistors; PROD_ID: RES-15343
R5 R11 R15 R23 R35 R38 R53 R69 R72 R77 R93 R96 R101 R117 R120 R125 R141 R144 = SparkFun-Resistors; PROD_ID: RES-14241
R6 R10 R13 R14 R27 R49 R51 R52 R63 R75 R76 R87 R99 R100 R111 R123 R124 R135 = SparkFun-Resistors; PROD_ID: RES-14341
R7-R9 R12 R42 R44 R73 R74 R97 R98 R121 R122 = SparkFun-Resistors; PROD_ID: RES-14340
R17-R19 R25 R40 R41 R45 R48 R55-R57 R61 R79-R81 R85 R103-R105 R109 R127-R129 R133 = SparkFun-Resistors; PROD_ID: RES-14342
R24 R36 R70 R94 R118 R142 = SparkFun-Resistors; PROD_ID: RES-12581
R28 R43 R64 R88 R112 R136 = SparkFun-Resistors; PROD_ID: RES-07849
R29 R46 R65 R89 R113 R137 = SparkFun-Resistors; PROD_ID: RES-07863
S1-S6 = SparkFun-Switches; PROD_ID: SWCH-15606
TP1-TP5 TP22 = SparkFun-Connectors
U1 U10 U17 U23 U29 U35 = SparkFun-RF; PROD_ID: IC-15573
U2 U9 U16 U22 U28 U34 = SparkFun-IC-Comms; PROD_ID: IC-15360
U3 U12 U18 U24 U30 U36 = SparkFun-IC-Power; PROD_ID: VREG-12457
U4 U6 U13 U19 U25 U31 = SparkFun-IC-Memory; PROD_ID: IC-14645
U5 U7 U14 U20 U26 U32 = SparkFun-IC-Power; PROD_ID: VREG-14094
U8 U11 U15 U21 U27 U33 = SparkFun-IC-Logic; PROD_ID: COMP-08268
U$1 U$2 U$4 U$6-U$11 U$13-U$25 U$30 U$32 U$33 U$37-U$56 U$61-U$63 U$67-U$87 U$91-U$93 U$97-U$116 U$120-U$122 U$126-U$146 U$150-U$152 U$156-U$174 = output
U$5 U$26-U$29 U$31 U$34 U$57-U$60 U$64 U$88-U$90 U$94 U$117-U$119 U$123 U$147-U$149 U$153 = HPG_Solution